# Altium PCB Power_Box_V2.PcbDoc (part 1 of 3)
Units mm, origin at the board's own origin, x right, y up, seen from the top; angles counter-clockwise.
Board outline 100 x 80 mm, 4 copper layers (Top Layer, Mid-Top, Mid-Bottom, Bottom Layer), stack 0.603 mm thick; 240 components, 204 nets, 825 pads, 313 vias.
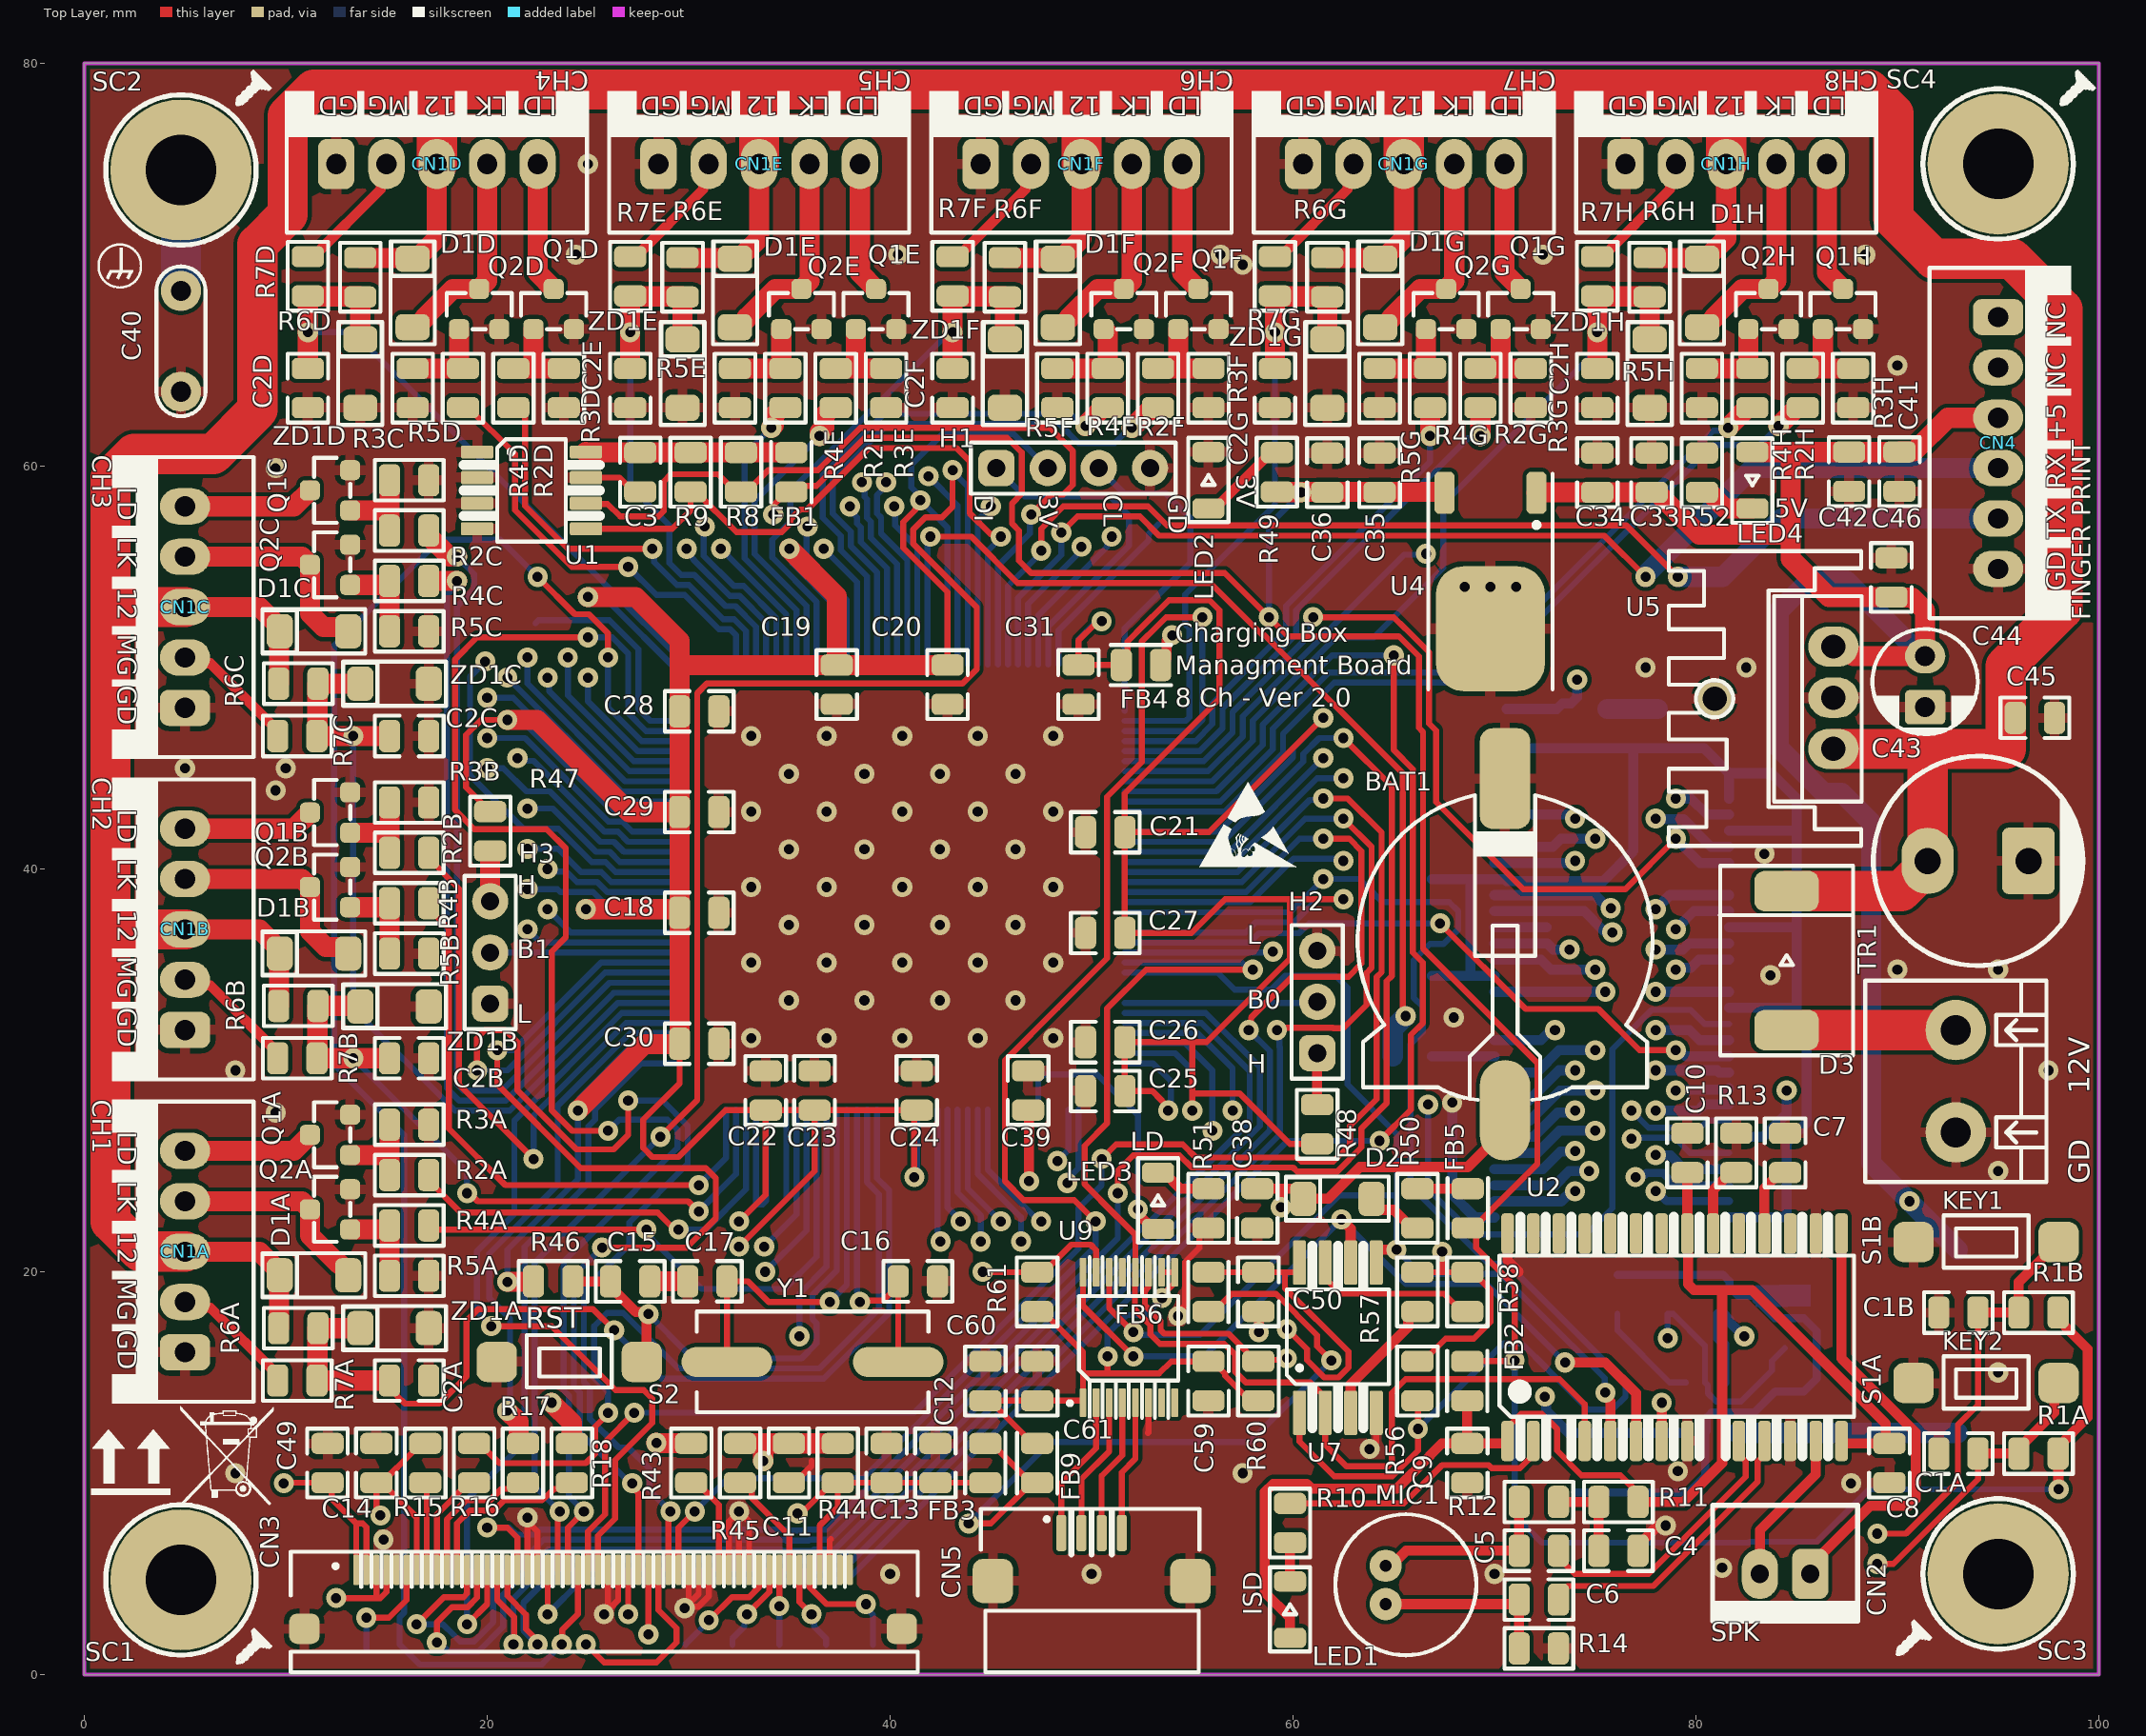
[diagram p0: Top Layer view]
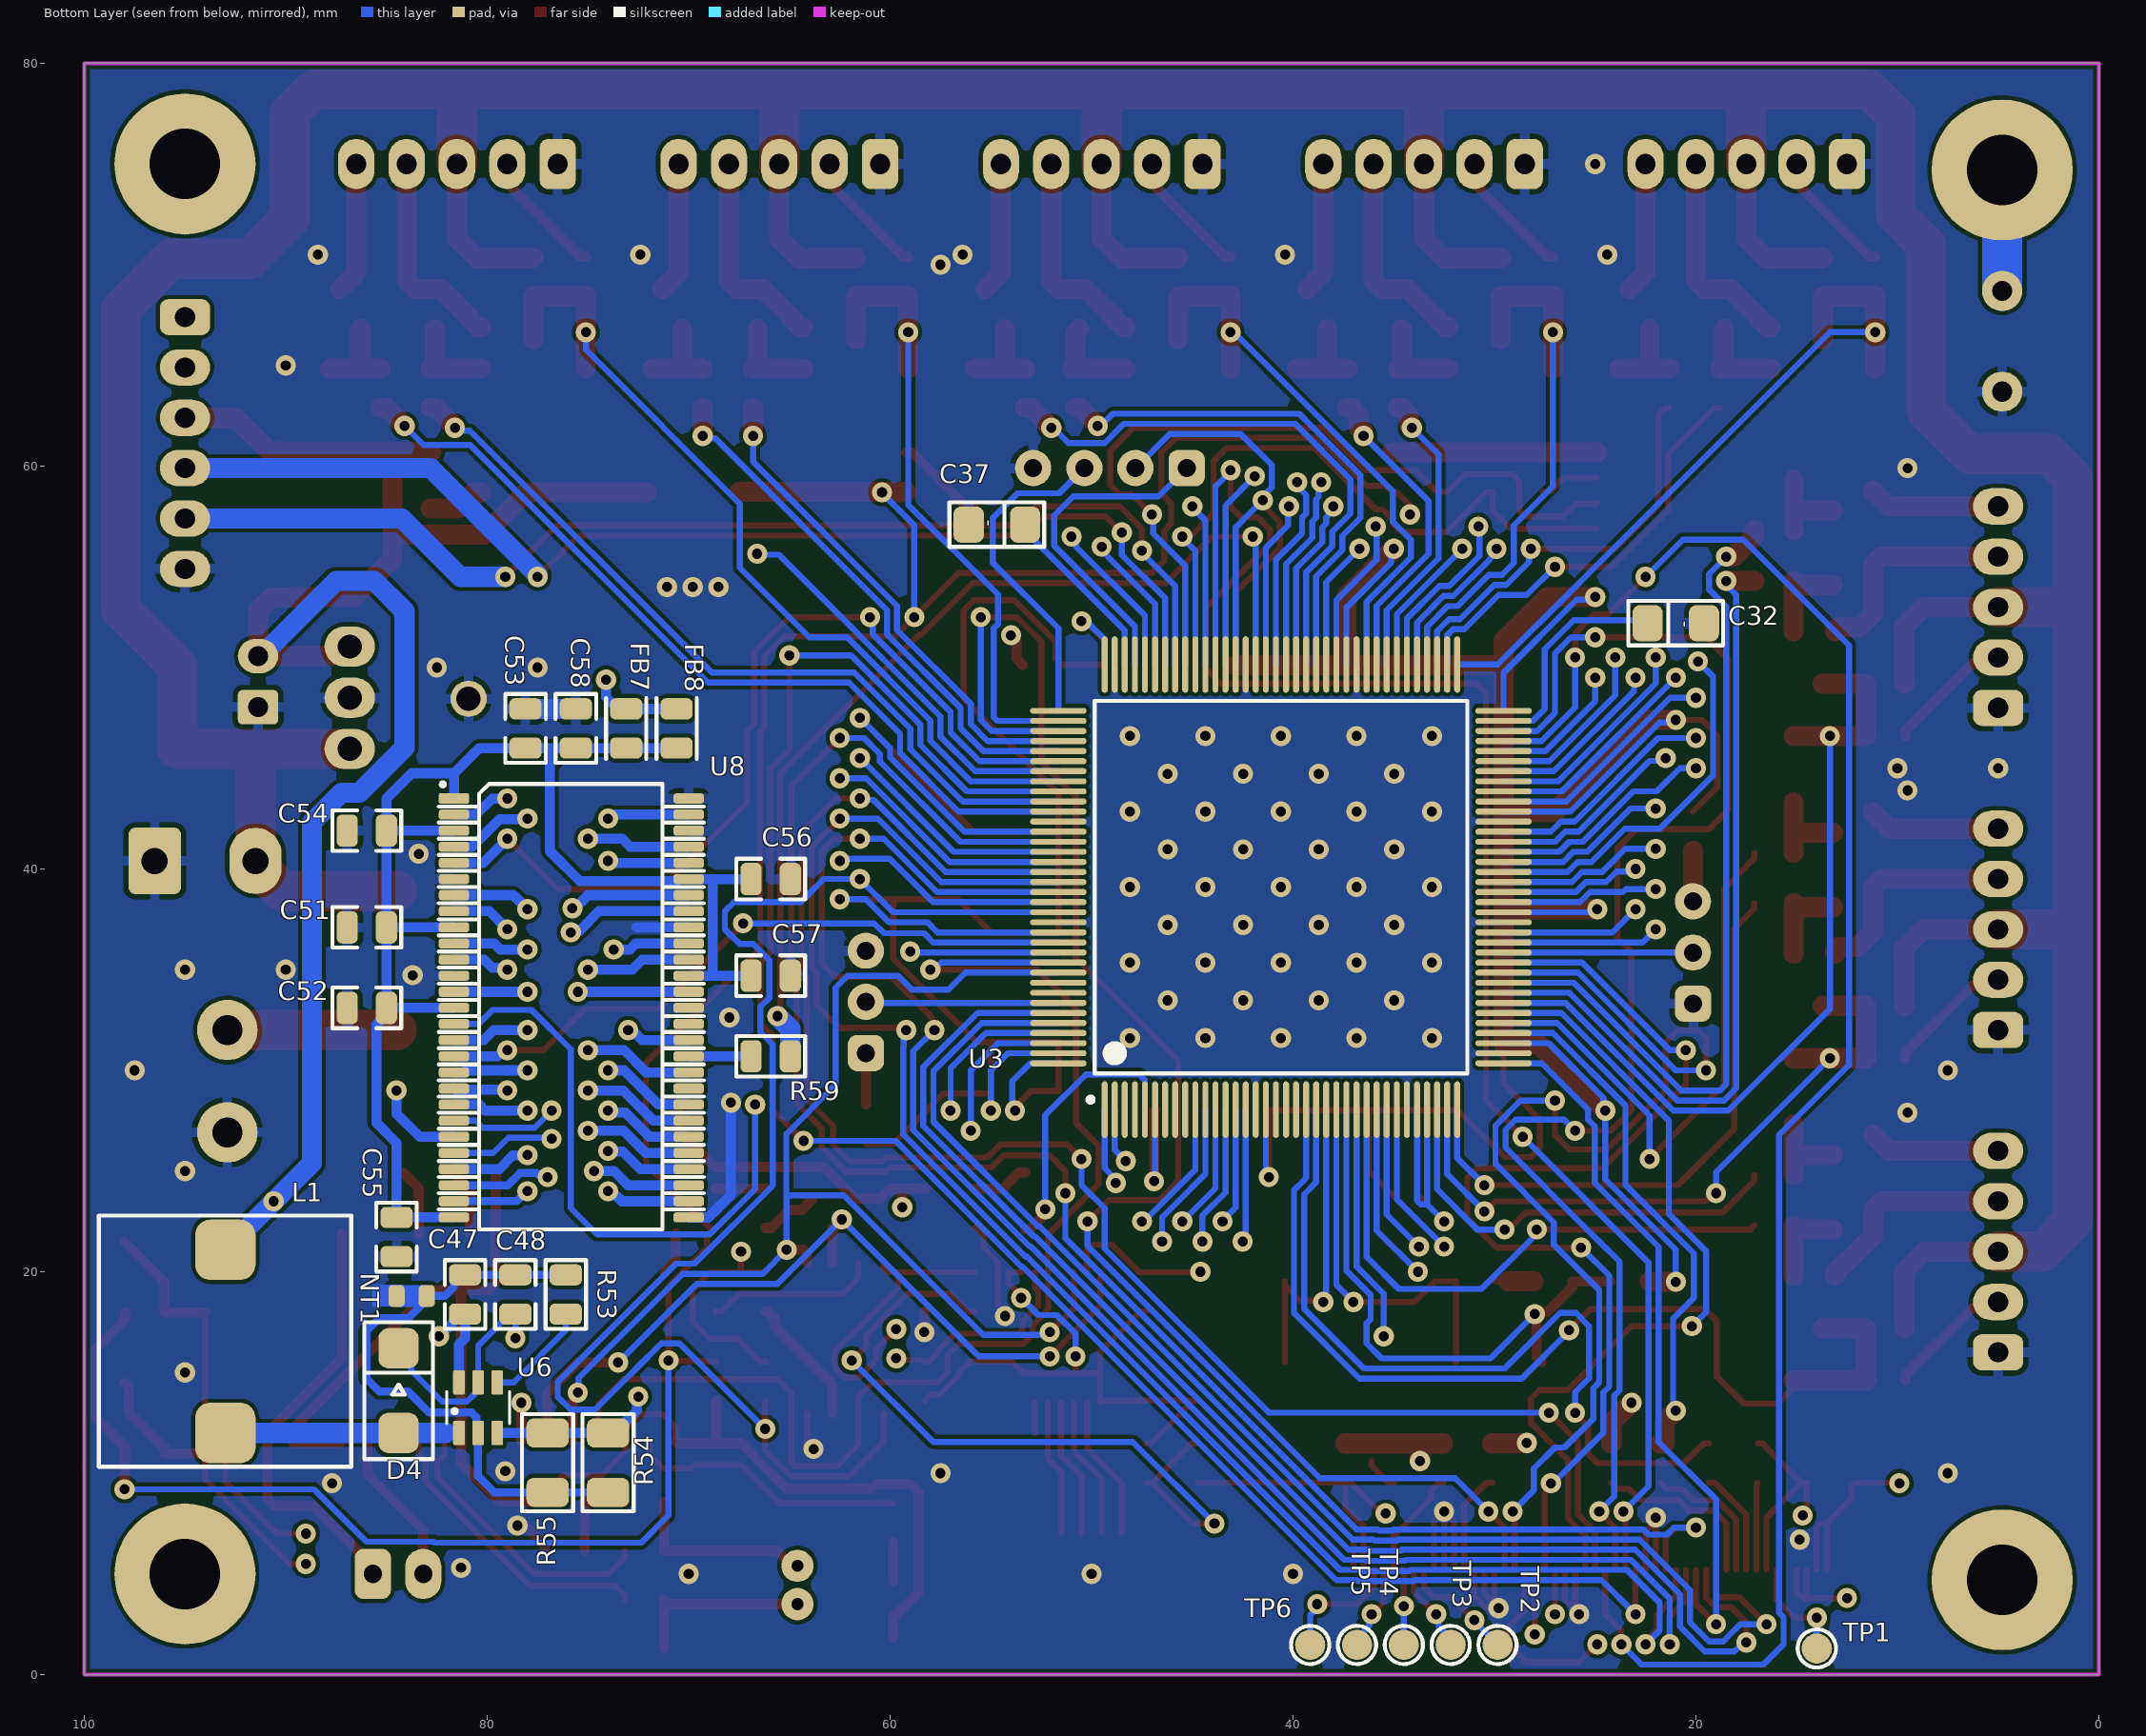
[diagram p1: Bottom Layer view, seen from below]
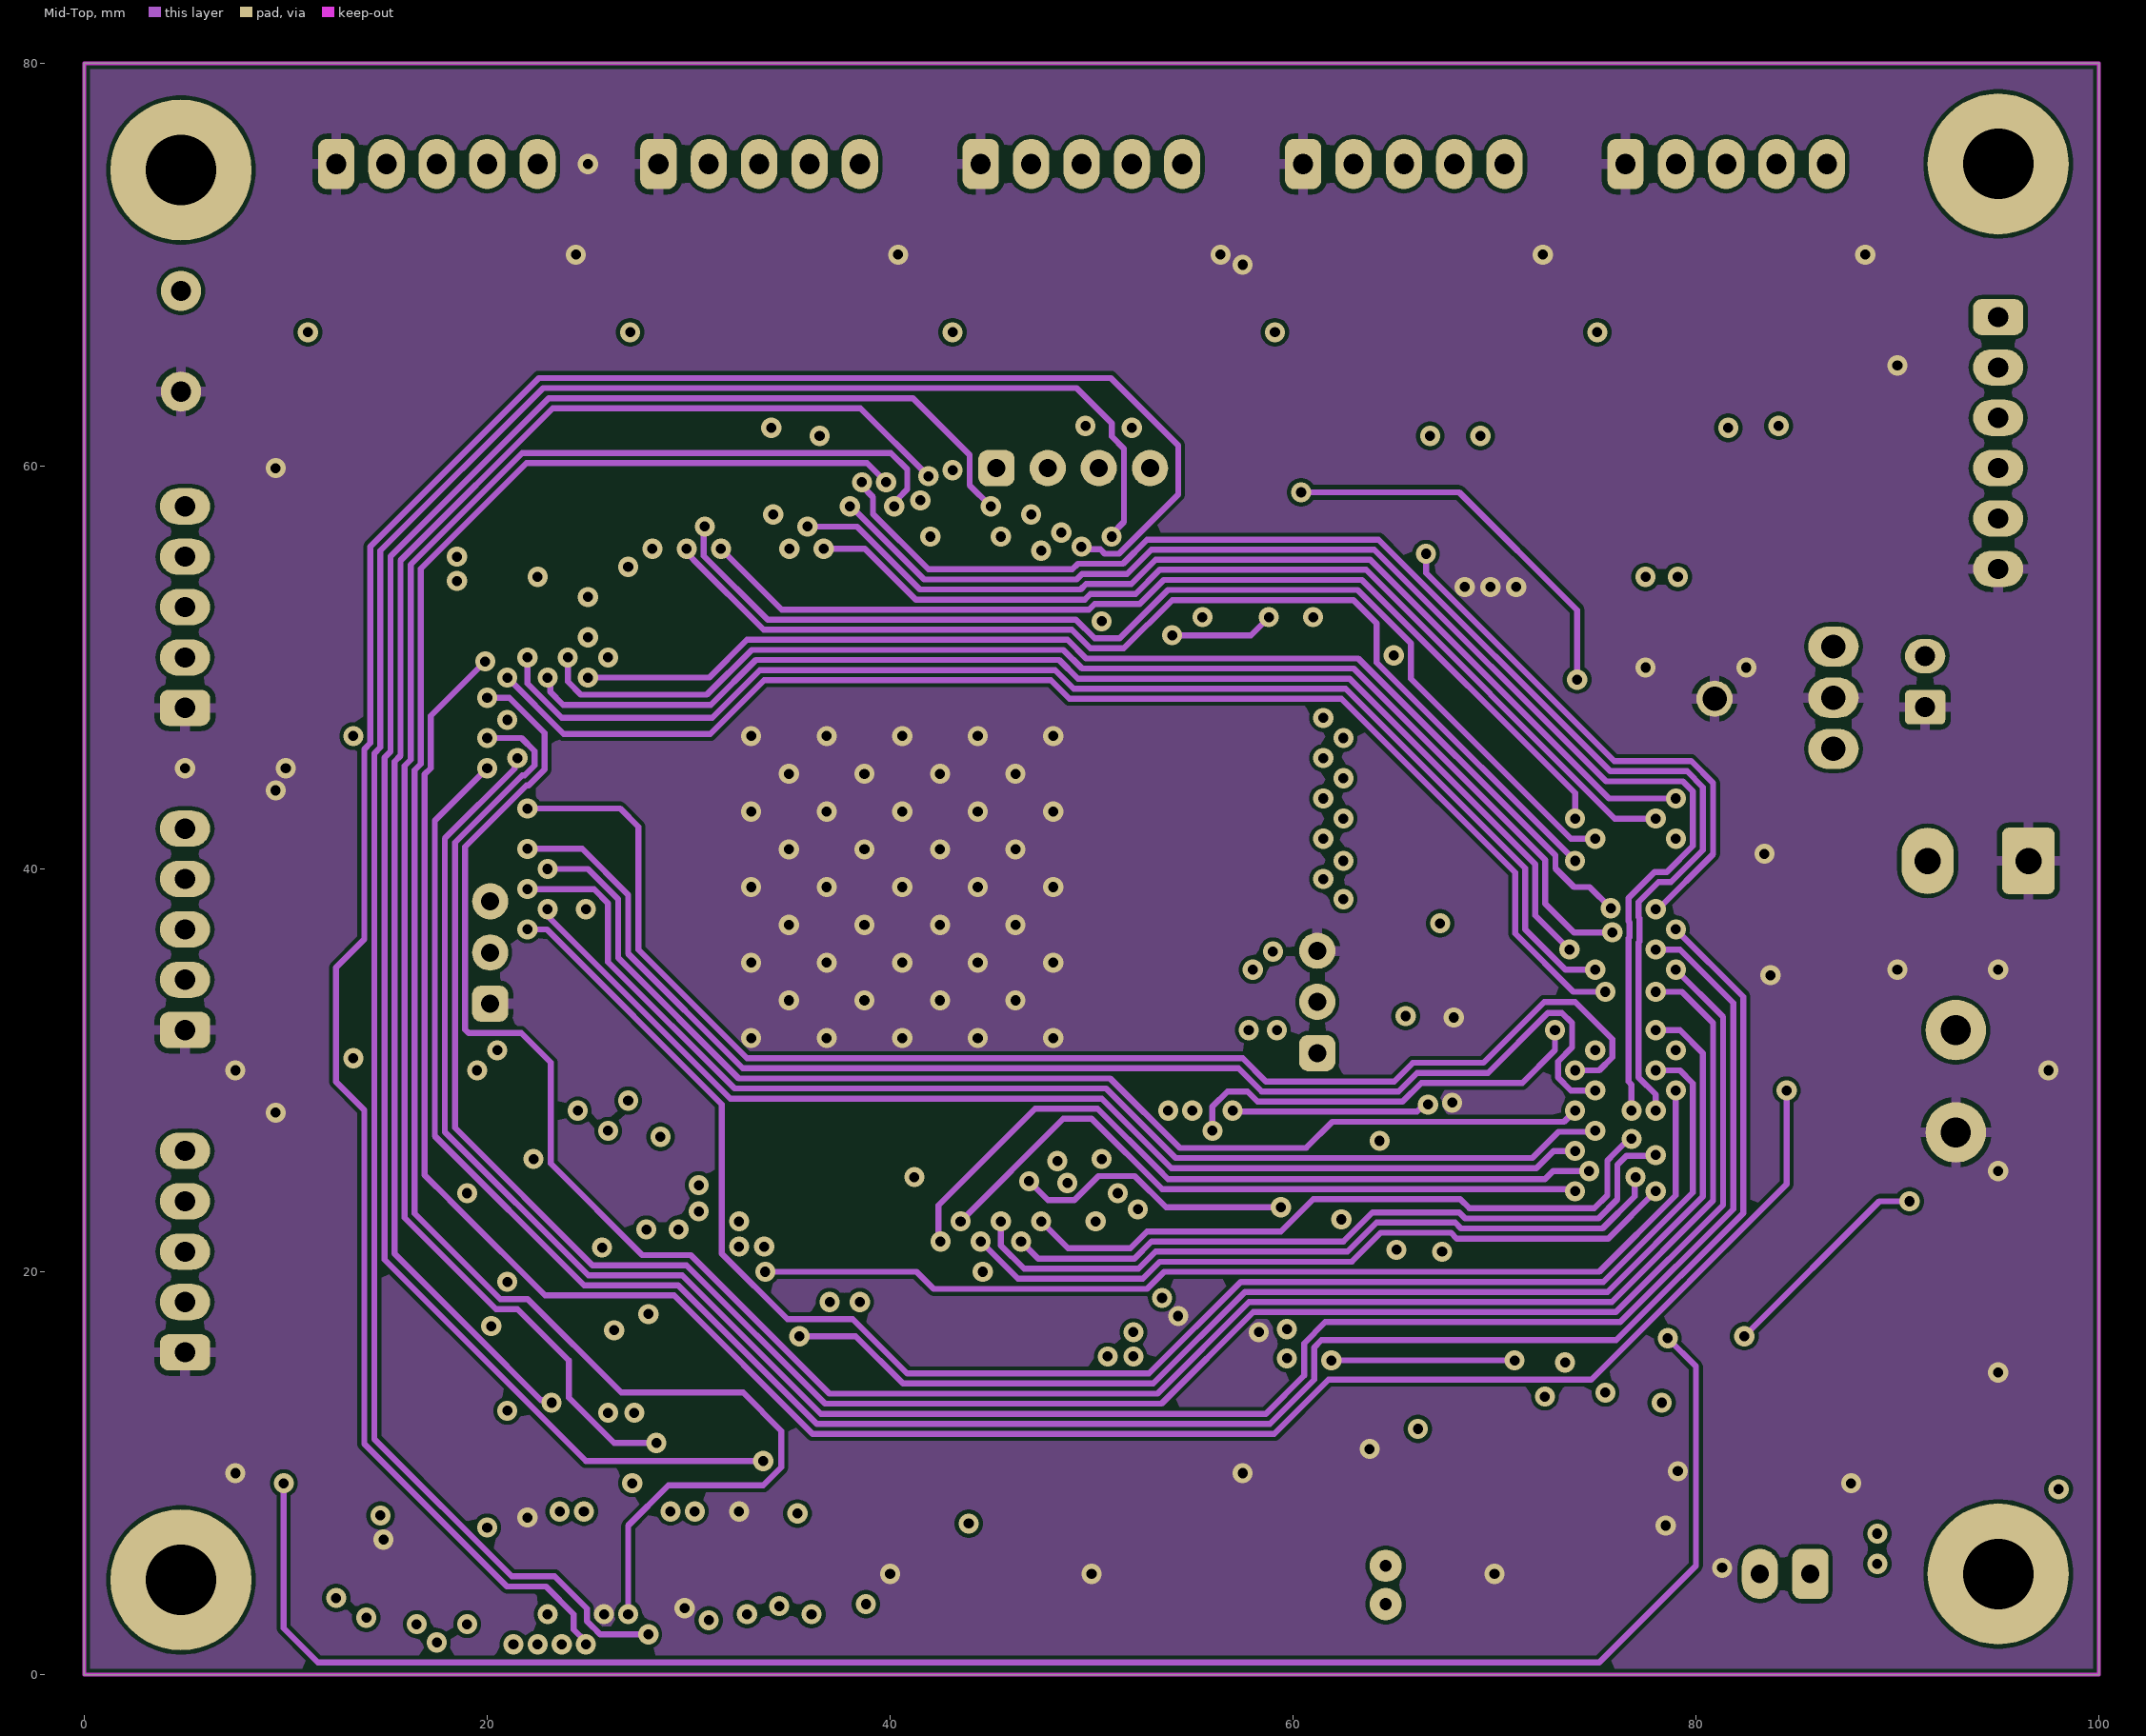
[diagram p2: Mid-Top]
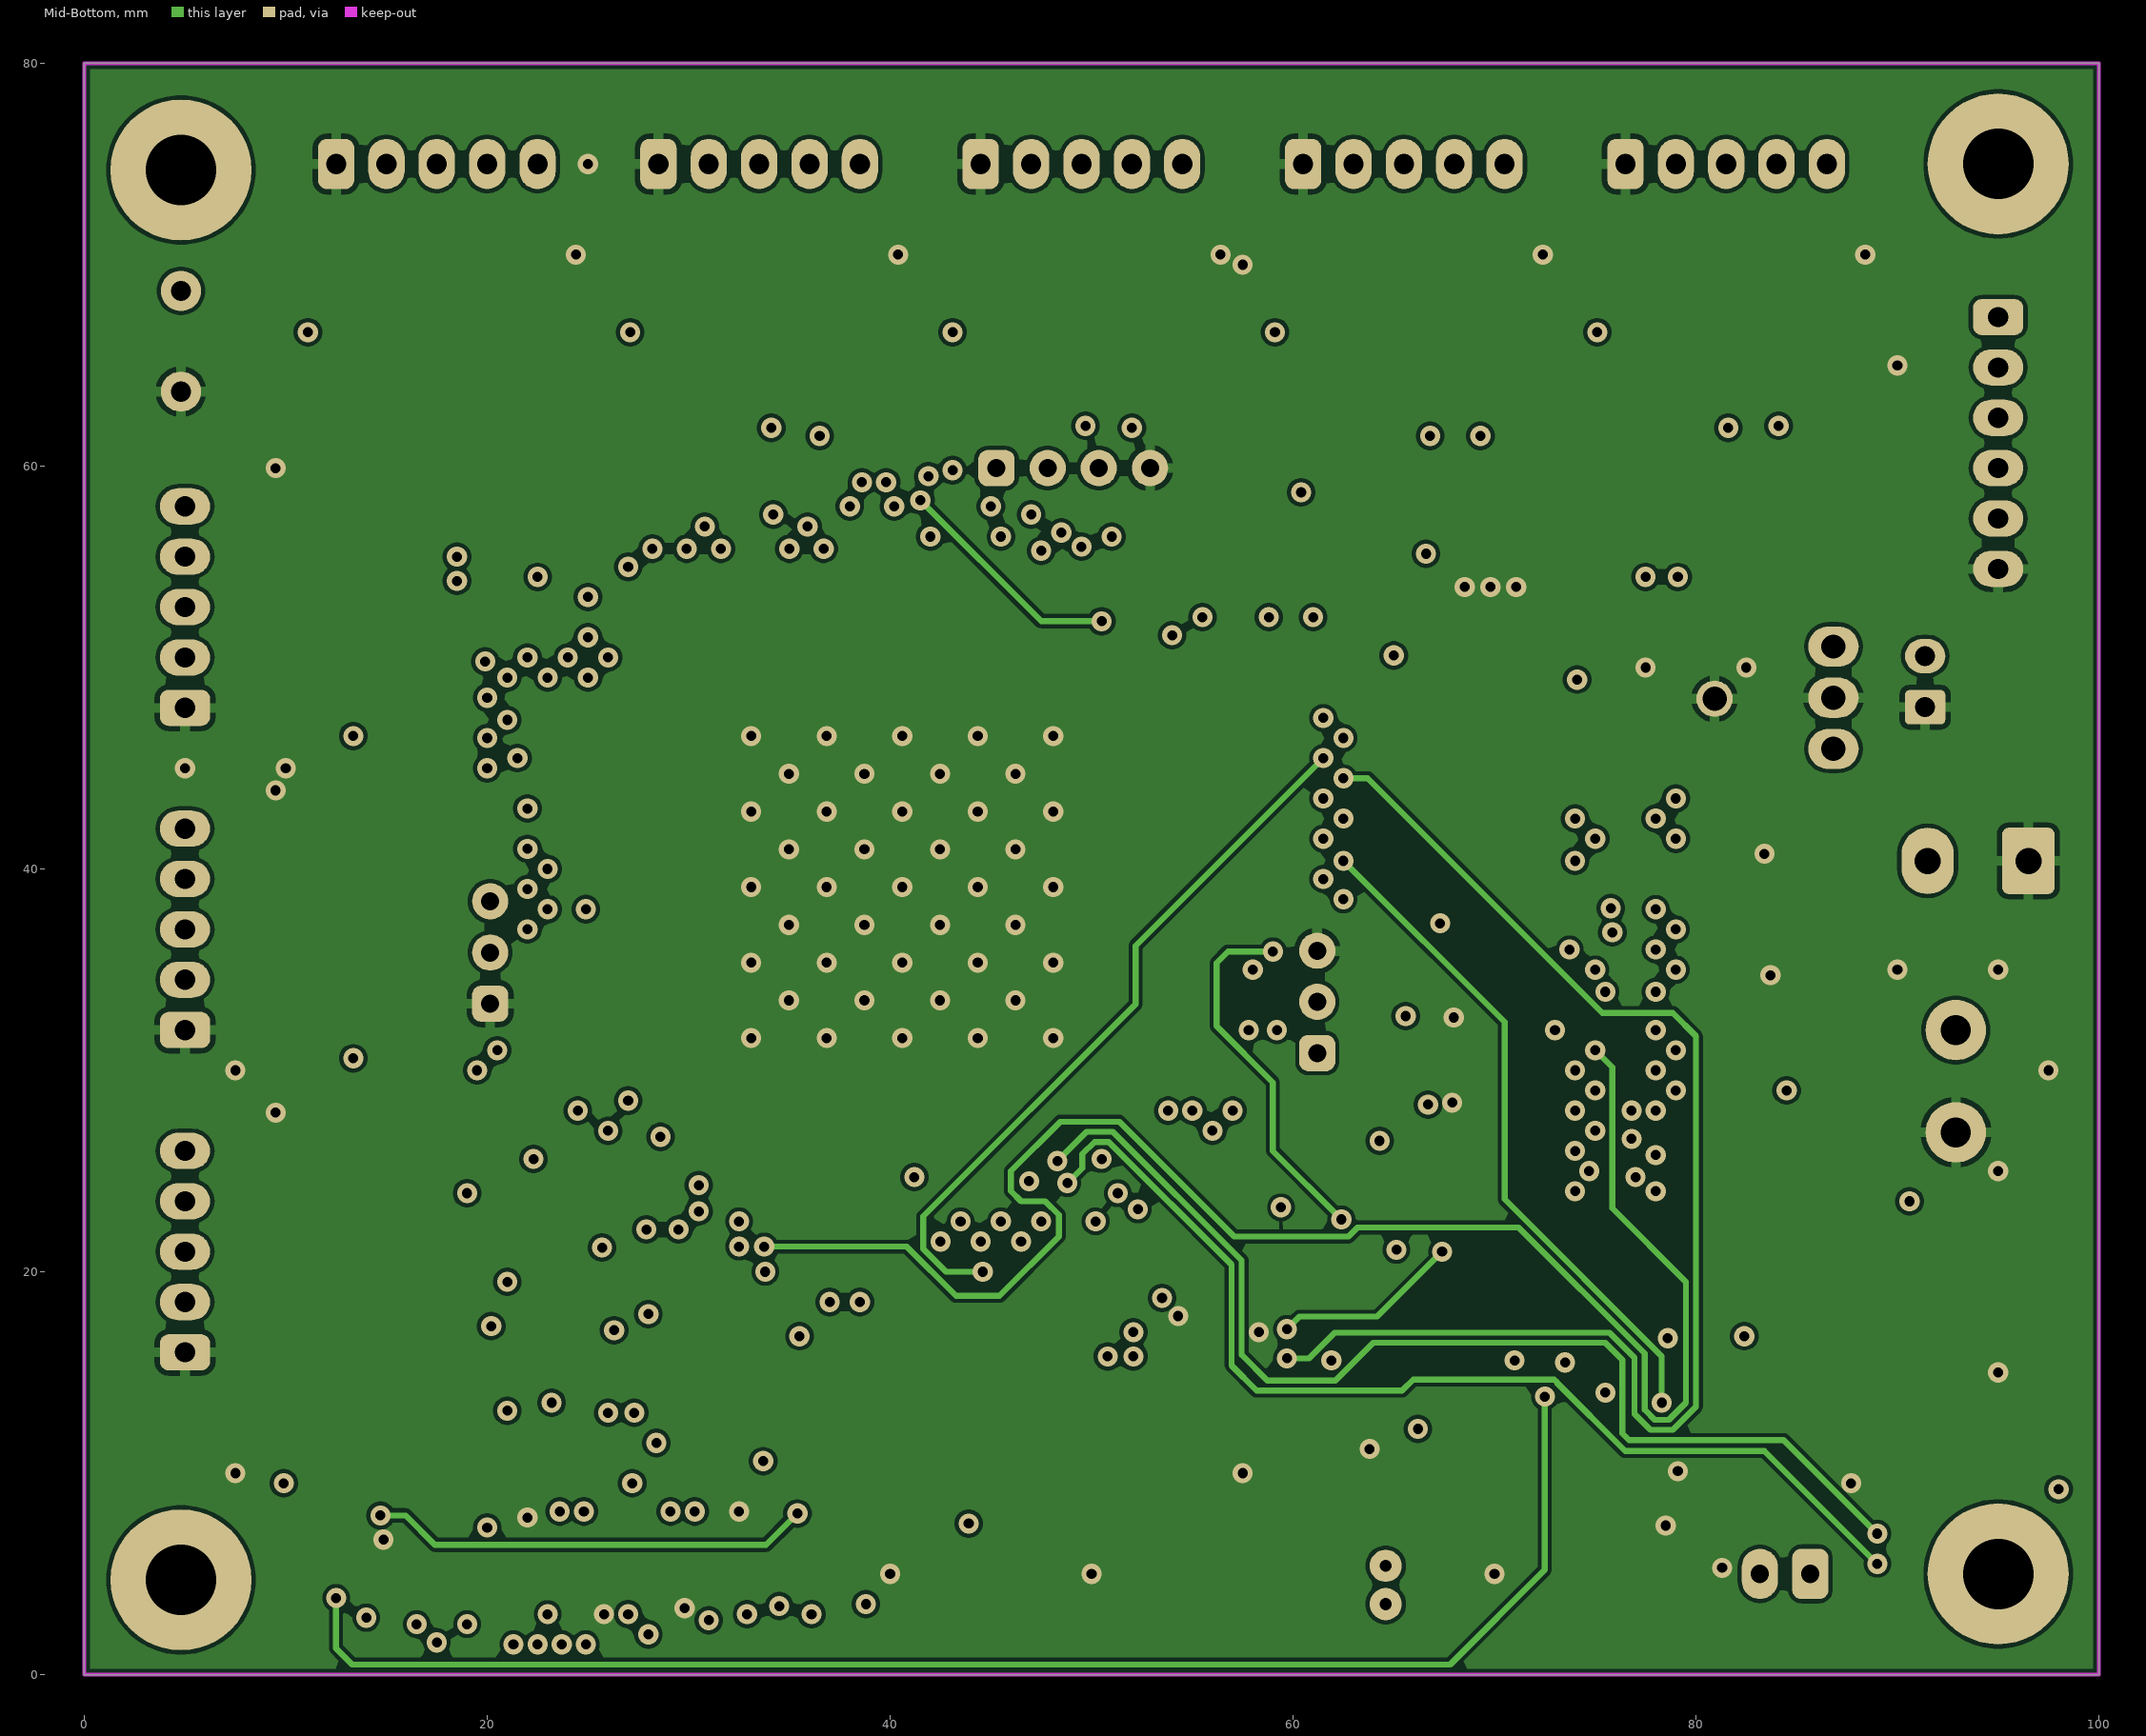
[diagram p3: Mid-Bottom]
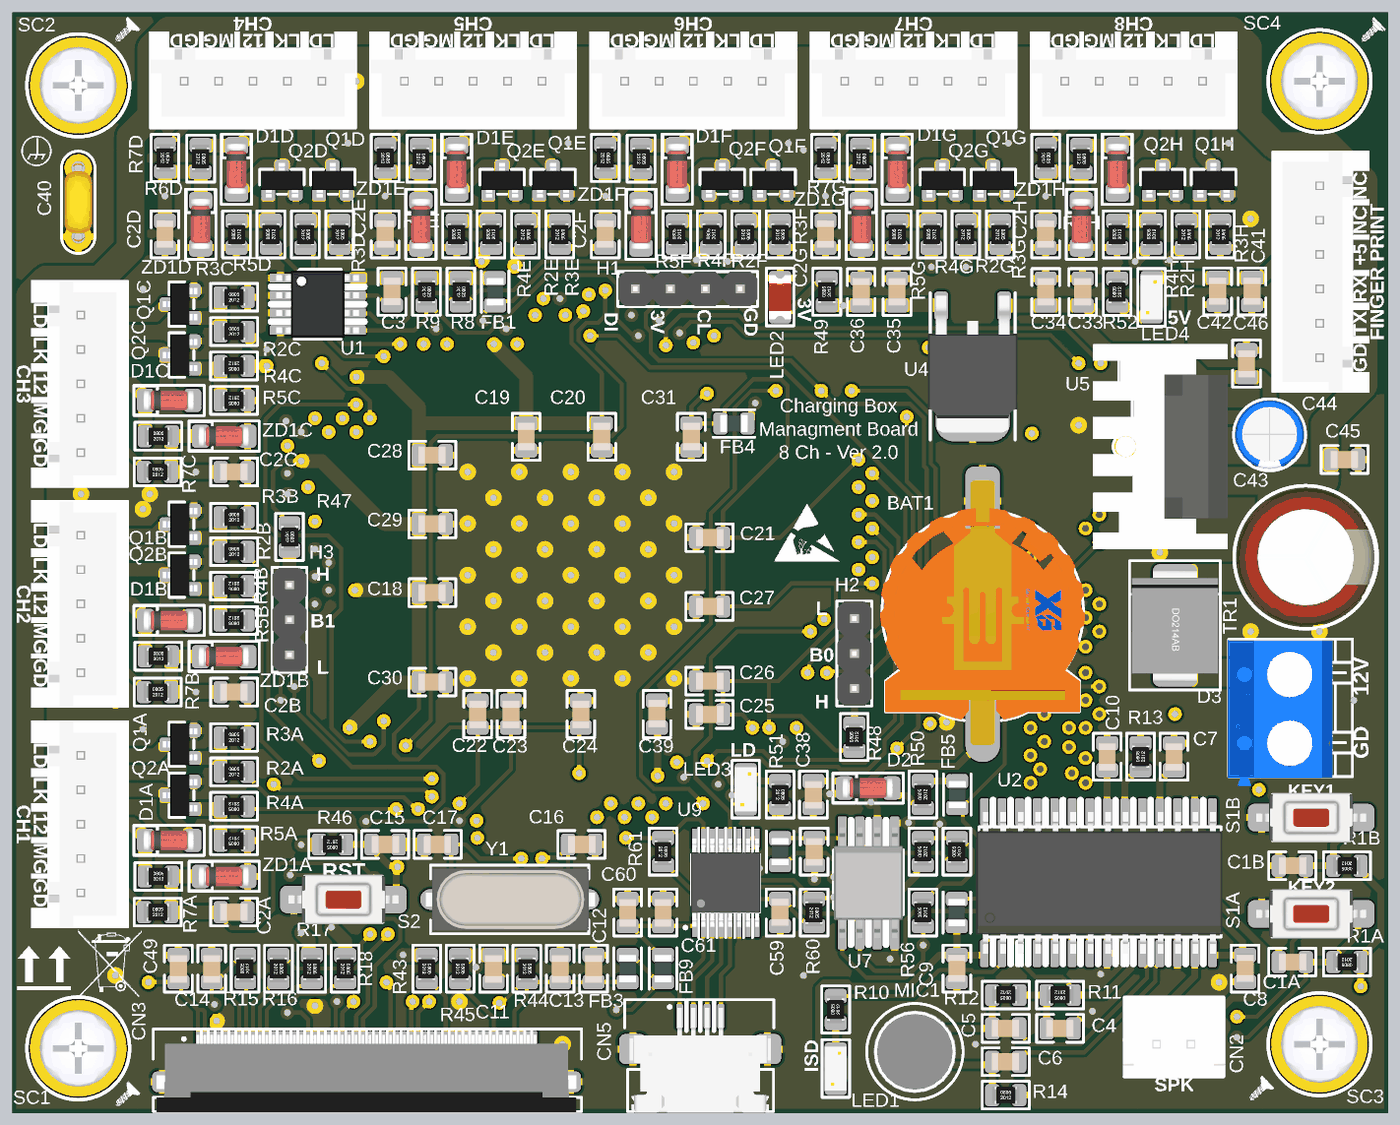
[diagram p6: 3D render of the assembled board from above, using the file's embedded part models]
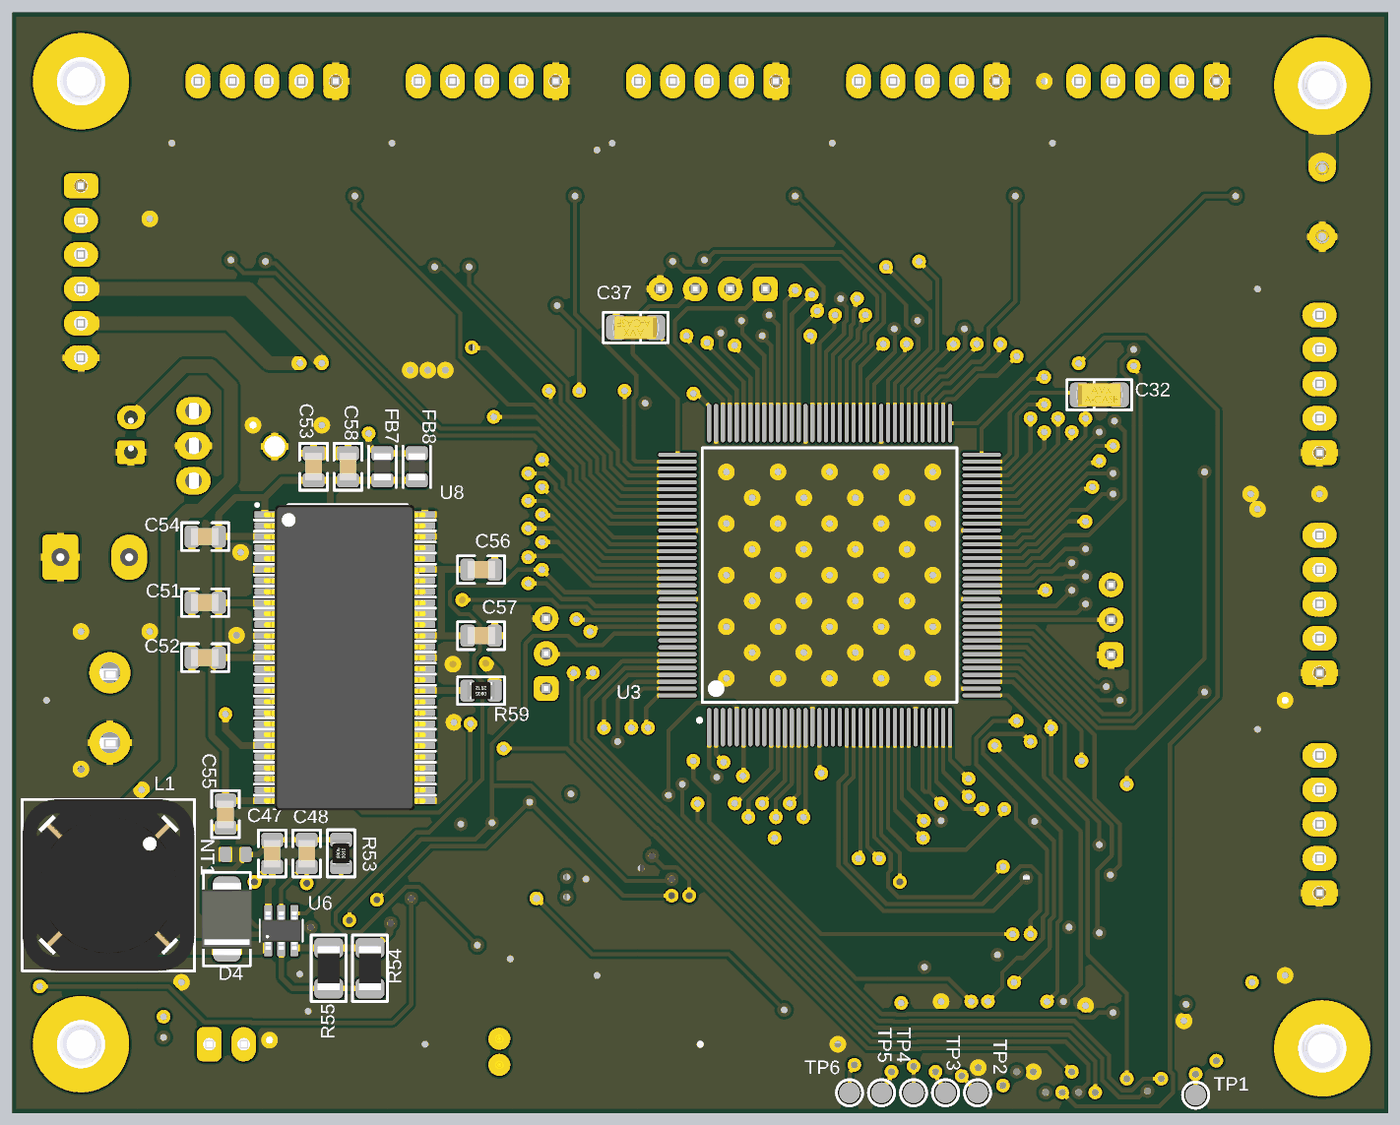
[diagram p7: 3D render of the assembled board from below, using the file's embedded part models]

## Layer stack, top to bottom
Top Solder: solder mask 0.0102, Solder Resist, Dk 3.5
Top Layer: signal copper 0.035
Dielectric 2: prepreg 0.0711, PP-006, Dk 4.1
Mid-Top: signal copper 0.0356
Dielectric 1: dielectric 0.32, FR-4, Dk 4.8
Mid-Bottom: signal copper 0.0356
Dielectric 3: prepreg 0.0711, PP-006, Dk 4.1
Bottom Layer: signal copper 0.035
Bottom Solder: solder mask 0.0102, Solder Resist, Dk 3.5

## Board outline
0,0 100,0 100,80 0,80

## Design rules (kind name [scope] priority, off if disabled: settings)
Clearance [All] p1: gap=0.2 ignorepadtopadclearanceinfootprint=TRUE
ComponentClearance ComponentClearance_ISD [InComponent('U2')] p1: gap=0.254 collisioncheckmode=3 verticalgap=0.1 showdistances=FALSE
ComponentClearance ComponentClearance_STM [InComponent('U3')] p2: gap=4 collisioncheckmode=3 verticalgap=0.254 showdistances=FALSE checkcomponentboundary=TRUE
ComponentClearance [All] p3: gap=0.2 collisioncheckmode=3 verticalgap=0.254 showdistances=FALSE checkcomponentboundary=TRUE
DiffPairsRouting [All] p1: maxlimit=0.3 minlimit=0.2 mostfreqgap=0.3 toplayer_minwidth=0.3 toplayer_maxwidth=0.5 toplayer_prefwidth=0.3 midlayer1_minwidth=0.3 midlayer1_maxwidth=0.5 midlayer1_prefwidth=0.3 midlayer2_minwidth=0.3 midlayer2_maxwidth=0.5 midlayer2_prefwidth=0.3 bottomlayer_minwidth=0.3 bottomlayer_maxwidth=0.5 bottomlayer_prefwidth=0.3 maxuncoupledlength=12.7
Height [All] p1: minheight=0 maxheight=25.4 prefheight=17.2
HoleToHoleClearance [All] p1: gap=0.2 allowstackedmicrovias=TRUE
MinimumSolderMaskSliver [All] p1: minsoldermaskwidth=0.2
PlaneConnect [All] p1: pad.planeconnectstyle=Relief pad.reliefexpansion=0.508 pad.reliefentries=4 pad.reliefconductorwidth=0.5 pad.reliefairgap=0.254 via.planeconnectstyle=Direct via.reliefexpansion=0.508 via.reliefentries=4 via.reliefconductorwidth=0.254 via.reliefairgap=0.254
PolygonConnect [All] p1: thpad.connectstyle=Relief thpad.reliefconductorwidth=0.5 thpad.reliefentries=4 thpad.polygonreliefangle="90 Angle" thpad.airgapwidth=0.254 smdpad.connectstyle=Relief smdpad.reliefconductorwidth=0.5 smdpad.reliefentries=4 smdpad.polygonreliefangle="90 Angle" smdpad.airgapwidth=0.254 via.connectstyle=Direct via.reliefconductorwidth=0.254 via.reliefentries=4 via.polygonreliefangle="90 Angle" via.airgapwidth=0.254
RoomDefinition CHANNELI [InComponentClass('CHANNELI')] p1: confinementstyle=ConfineIn formatcopy=TRUE lockcomponents=FALSE outline 73.5,61.9 89.5,61.9 89.5,80 73.5,80
RoomDefinition KEYC [InComponentClass('KEYC')] p2: confinementstyle=ConfineIn formatcopy=TRUE lockcomponents=FALSE outline 89.5,16.4 99.5,16.4 99.5,23.475 89.5,23.475
RoomDefinition IS42S16400J [InComponentClass('IS42S16400J')] p3: confinementstyle=ConfineOut formatcopy=TRUE lockcomponents=FALSE outline 197.756,13.676 275.26,13.676 275.26,39.052 197.756,39.052
RoomDefinition XPT2046 [InComponentClass('XPT2046')] p4: confinementstyle=ConfineOut formatcopy=TRUE lockcomponents=FALSE outline 102.075,-15.1 154.375,-15.1 154.375,0.1 102.075,0.1
RoomDefinition CHANNELH [InComponentClass('CHANNELH')] p5: confinementstyle=ConfineIn formatcopy=TRUE lockcomponents=FALSE outline 57.5,61.9 73.5,61.9 73.5,80 57.5,80
RoomDefinition CHANNELG [InComponentClass('CHANNELG')] p6: confinementstyle=ConfineIn formatcopy=TRUE lockcomponents=FALSE outline 41.5,61.9 57.5,61.9 57.5,80 41.5,80
RoomDefinition CHANNELF [InComponentClass('CHANNELF')] p7: confinementstyle=ConfineIn formatcopy=TRUE lockcomponents=FALSE outline 25.5,61.9 41.5,61.9 41.5,80 25.5,80
RoomDefinition CHANNELE [InComponentClass('CHANNELE')] p8: confinementstyle=ConfineIn formatcopy=TRUE lockcomponents=FALSE outline 9.5,61.9 25.5,61.9 25.5,80 9.5,80
RoomDefinition CHANNELD [InComponentClass('CHANNELD')] p9: confinementstyle=ConfineIn formatcopy=TRUE lockcomponents=FALSE outline 18.1,45 18.1,61 0,61 0,45
RoomDefinition CHANNELC [InComponentClass('CHANNELC')] p10: confinementstyle=ConfineIn formatcopy=TRUE lockcomponents=FALSE outline 18.1,29 18.1,45 0,45 0,29
RoomDefinition CHANNELB [InComponentClass('CHANNELB')] p11: confinementstyle=ConfineIn formatcopy=TRUE lockcomponents=FALSE outline 18.1,13 18.1,29 0,29 0,13
RoomDefinition W25Q32 [InComponentClass('W25Q32')] p12: confinementstyle=ConfineOut formatcopy=TRUE lockcomponents=FALSE outline 196,46.7 246.8,46.7 246.8,72.1 196,72.1
RoomDefinition MC3202 [InComponentClass('MC3202')] p13: confinementstyle=ConfineOut formatcopy=TRUE lockcomponents=FALSE outline 136.883,98.092 187.683,98.092 187.683,123.492 136.883,123.492
RoomDefinition ISD1730 [InComponentClass('ISD1730')] p14: confinementstyle=ConfineOut formatcopy=TRUE lockcomponents=FALSE outline 127.923,83.3 162.7,83.3 162.7,96.051 127.923,96.051
RoomDefinition TFT [InComponentClass('TFT')] p15: confinementstyle=ConfineOut formatcopy=TRUE lockcomponents=FALSE outline 101.131,184.835 348.143,184.835 348.143,219.162 101.131,219.162
RoomDefinition STM_AUX [InComponentClass('STM_AUX')] p16: confinementstyle=ConfineOut formatcopy=TRUE lockcomponents=FALSE outline 396.088,132.3 639,132.3 639,156.951 396.088,156.951
RoomDefinition Power [InComponentClass('Power')] p17: confinementstyle=ConfineOut formatcopy=TRUE lockcomponents=FALSE outline 167.348,122.524 243.202,122.524 243.202,157.326 167.348,157.326
RoomDefinition MCU [InComponentClass('MCU')] p18: confinementstyle=ConfineOut formatcopy=TRUE lockcomponents=FALSE outline 101.131,95.306 124.883,95.306 124.883,121.582 101.131,121.582
RoomDefinition KEYB [InComponentClass('KEYB')] p19: confinementstyle=ConfineIn formatcopy=TRUE lockcomponents=FALSE outline 89.5,9.4 99.5,9.4 99.5,16.475 89.5,16.475
RoomDefinition Interface [InComponentClass('Interface')] p20: confinementstyle=ConfineOut formatcopy=TRUE lockcomponents=FALSE outline 102.056,51.126 175.01,51.126 175.01,71.577 102.056,71.577
RoomDefinition EEPROM [InComponentClass('EEPROM')] p21: confinementstyle=ConfineOut formatcopy=TRUE lockcomponents=FALSE outline 102.056,41.801 129.633,41.801 129.633,49.876 102.056,49.876
RoutingVias [All] p1: holewidth=0.5 width=1 viastyle="Through Hole" minholewidth=0.5 minwidth=1 maxholewidth=0.711 maxwidth=1.27
SilkToSilkClearance [All] p1: silktosilkclearance=0.2
SilkToSolderMaskClearance [IsPad] p1: minsilkscreentomaskgap=0.2 clearancetoexposedcopper=TRUE
SolderMaskExpansion [All] p1: expansion=0.102 istentingtop=FALSE
Width [All] p1: maxlimit=2 minlimit=0.3 preferedwidth=0.5
22 further rules are at their usual default settings.

## Classes and differential pairs
net class MCU_KEY[1..2]: MCU_KEY1 MCU_KEY2
component class XPT2046: C59 C60 C61 CN5 FB9 R60 R61 U9
component class Power: C43 C44 C45 C46 D3 LED4 R52 TR1 U5
component class W25Q32: C50 FB6 R56 R57 R58 U7
component class IS42S16400J: C51 C52 C53 C54 C55 C56 C57 C58 FB7 FB8 R59 U8
channel class "Digital Input": KEYB KEYC
channel class Channel: CHANNELB CHANNELC CHANNELD CHANNELE CHANNELF CHANNELG CHANNELH CHANNELI
net class STM32: GND_MCU LTDC_B2 LTDC_B3 LTDC_B4 LTDC_B5 LTDC_B6 LTDC_B7 LTDC_CLK LTDC_DE LTDC_G2 LTDC_G3 LTDC_G4 LTDC_G5 LTDC_G6 LTDC_G7 LTDC_HSYNC LTDC_R2 LTDC_R3 LTDC_R4 LTDC_R5 LTDC_R6 LTDC_R7 LTDC_RST LTDC_VSYNC MCU_BOOT0 MCU_BOOT1 MCU_KEY1 MCU_KEY2 MCU_LED1 MCU_LED2 MCU_LED3 MCU_LED4 MCU_LED5 MCU_LED6 MCU_LED7 MCU_LED8 MCU_LOCK1 MCU_LOCK2 MCU_LOCK3 MCU_LOCK4 MCU_LOCK5 MCU_LOCK6 MCU_LOCK7 MCU_LOCK8 MCU_MAGNET1 MCU_MAGNET2 MCU_MAGNET3 MCU_MAGNET4 MCU_MAGNET5 MCU_MAGNET6 MCU_MAGNET7 MCU_MAGNET8 MCU_NRST MCU_OCS_N MCU_OCS_P MCU_RXD MCU_SCL MCU_SDA MCU_SWCLK MCU_SWDIO MCU_TXD MCU_VBAT NetLED3_1 NetR56_1 NetR59_1 NetR60_1 NetR61_1 NetU2_4 NetU2_5 NetU2_6 NetU2_7 NetU3_1 NetU3_2 NetU3_3 NetU3_4 NetU3_5 NetU3_7 NetU3_8 NetU3_9 NetU3_10 NetU3_11 NetU3_12 NetU3_13 NetU3_14 NetU3_15 NetU3_26 NetU3_28 NetU3_29 NetU3_48 NetU3_49 NetU3_50 NetU3_53 NetU3_54 NetU3_55 NetU3_56 NetU3_57 NetU3_58 NetU3_59 NetU3_60 NetU3_63 NetU3_64 NetU3_65 NetU3_66 NetU3_67 NetU3_68 NetU3_69 NetU3_70 NetU3_77 NetU3_78 NetU3_79 NetU3_80 NetU3_81 NetU3_82 NetU3_85 NetU3_86 NetU3_87 NetU3_88 NetU3_89 NetU3_90 NetU3_91 NetU3_92 NetU3_93 NetU3_96 NetU3_97 NetU3_98 NetU3_99 NetU3_100 NetU3_103 NetU3_104 NetU3_110 NetU3_111 NetU3_112 NetU3_113 NetU3_114 NetU3_115 NetU3_116 NetU3_117 NetU3_118 NetU3_119 NetU3_122 NetU3_123 NetU3_124 NetU3_125 NetU3_126 NetU3_127 NetU3_128 NetU3_129 NetU3_132 NetU3_133 NetU3_134 NetU3_135 NetU3_139 NetU3_140 NetU3_141 NetU3_142 NetU3_143 V_CAP_1 V_CAP_2 VCC_MCU
net class MCU_MAGNET[1..8]: MCU_MAGNET1 MCU_MAGNET2 MCU_MAGNET3 MCU_MAGNET4 MCU_MAGNET5 MCU_MAGNET6 MCU_MAGNET7 MCU_MAGNET8
net class MCU_LOCK[1..8]: MCU_LOCK1 MCU_LOCK2 MCU_LOCK3 MCU_LOCK4 MCU_LOCK5 MCU_LOCK6 MCU_LOCK7 MCU_LOCK8
net class MCU_LED[1..8]: MCU_LED1 MCU_LED2 MCU_LED3 MCU_LED4 MCU_LED5 MCU_LED6 MCU_LED7 MCU_LED8
net class ISD: +3V3 GND_MCU ISD_LED ISD_MIC_N ISD_MIC_P NetC4_1 NetC5_1 NetC6_1 NetC7_1 NetLED1_2 NetR13_1 NetU2_3 NetU2_4 NetU2_5 NetU2_6 NetU2_7 NetU2_9 NetU2_17 NetU2_19 NetU2_22 NetU2_23 NetU2_24 NetU2_25 NetU2_26 NetU2_27 SPK_N SPK_P VCC_ISD
net class FPC: GND_MCU LTDC_B2 LTDC_B3 LTDC_B4 LTDC_B5 LTDC_B6 LTDC_B7 LTDC_CLK LTDC_DE LTDC_G2 LTDC_G3 LTDC_G4 LTDC_G5 LTDC_G6 LTDC_G7 LTDC_HSYNC LTDC_R2 LTDC_R3 LTDC_R4 LTDC_R5 LTDC_R6 LTDC_R7 LTDC_RST LTDC_VSYNC NetCN3_1 NetCN3_2 NetCN3_3 NetCN3_4 NetCN3_6 NetCN3_8 NetCN3_9 NetCN3_10 NetCN3_11 NetCN3_37 NetCN3_41 NetCN3_42 NetCN3_43 NetCN3_44 NetCN3_45 NetCN3_46 V_LED+ V_LED- VCC_TFT
component class TFT: C11 C12 C13 C14 CN3 FB3 R15 R16 R17 R18 R43 R44 R45 TP1 TP2 TP3 TP4 TP5 TP6
component class STM_AUX: BAT1 C15 C16 C17 C18 C19 C20 C21 C22 C23 C24 C25 C26 C27 C28 C29 C30 C31 C32 C33 C34 C35 C36 C37 C38 C39 D2 FB4 FB5 H1 H2 H3 LED2 R46 R47 R48 R49 R50 S2 U4 Y1
component class MC3202: C C48 C49 D4 L1 R54 R55 U6
component class MCU: U3
component class KEYC: C1B R1B S1B
component class KEYB: C1A R1A S1A
component class ISD1730: C4 C5 C6 C7 C8 C9 C10 CN2 FB2 LED1 MIC1 R10 R11 R12 R13 R14 U2
component class Interface: C40 C41 C42 CN4 LED3 NT1 R51 SC1 SC2 SC3 SC4
component class EEPROM: C3 FB1 R8 R9 U1
component class CHANNELI: C2H CN1H D1H Q1H Q2H R2H R3H R4H R5H R6H R7H ZD1H
component class CHANNELH: C2G CN1G D1G Q1G Q2G R2G R3G R4G R5G R6G R7G ZD1G
component class CHANNELG: C2F CN1F D1F Q1F Q2F R2F R3F R4F R5F R6F R7F ZD1F
component class CHANNELF: C2E CN1E D1E Q1E Q2E R2E R3E R4E R5E R6E R7E ZD1E
component class CHANNELE: C2D CN1D D1D Q1D Q2D R2D R3D R4D R5D R6D R7D ZD1D
component class CHANNELD: C2C CN1C D1C Q1C Q2C R2C R3C R4C R5C R6C R7C ZD1C
component class CHANNELC: C2B CN1B D1B Q1B Q2B R2B R3B R4B R5B R6B R7B ZD1B
component class CHANNELB: C2A CN1A D1A Q1A Q2A R2A R3A R4A R5A R6A R7A ZD1A
differential pair ISD_MIC: +ISD_MIC_P -ISD_MIC_N

## Components (designator, comment, footprint, x,y, rotation, side; value= is the part's Value field where it differs from the comment)
BAT1 "Bat Holder 2016-SMD" BAT-HOLDER-SMD-1220 70.525,36.25 r180 top
C1A "CAP Cer 100nF-50V-X7R-SMD" C-0805 93.025,10.975 r180 top value=100nF (schematic designator C1)
C1B "CAP Cer 100nF-50V-X7R-SMD" C-0805 93.025,17.975 r180 top value=100nF (schematic designator C1)
C2A "CAP Cer 100nF-50V-X7R-SMD" C-0805 16.125,14.6 r0 top value=100nF (schematic designator C2)
C2B "CAP Cer 100nF-50V-X7R-SMD" C-0805 16.125,30.6 r0 top value=100nF (schematic designator C2)
C2C "CAP Cer 100nF-50V-X7R-SMD" C-0805 16.125,46.6 r0 top value=100nF (schematic designator C2)
C2D "CAP Cer 100nF-50V-X7R-SMD" C-0805 11.1,63.875 r270 top value=100nF (schematic designator C2)
C2E "CAP Cer 100nF-50V-X7R-SMD" C-0805 27.1,63.875 r270 top value=100nF (schematic designator C2)
C2F "CAP Cer 100nF-50V-X7R-SMD" C-0805 43.1,63.875 r270 top value=100nF (schematic designator C2)
C2G "CAP Cer 100nF-50V-X7R-SMD" C-0805 59.1,63.875 r270 top value=100nF (schematic designator C2)
C2H "CAP Cer 100nF-50V-X7R-SMD" C-0805 75.1,63.875 r270 top value=100nF (schematic designator C2)
C3 "CAP Cer 100nF-50V-X7R-SMD" C-0805 27.597,59.7 r270 top value=100nF
C4 "CAP Cer 4.7uF-50V-X7R-SMD" C-0805 76.15,6.15 r0 top value=4.7uF
C5 "CAP Cer 100nF-50V-X7R-SMD" C-0805 72.2,6.15 r0 top value=100nF
C6 "CAP Cer 100nF-50V-X7R-SMD" C-0805 72.2,3.725 r0 top value=100nF
C7 "CAP Cer 4.7uF-50V-X7R-SMD" C-0805 84.425,25.9 r90 top value=4.7uF
C8 "CAP Cer 100nF-50V-X7R-SMD" C-0805 89.6,10.5 r270 top value=100nF
C9 "CAP Cer 100nF-50V-X7R-SMD" C-0805 68.648,10.5 r270 top value=100nF
C10 "CAP Cer 100nF-50V-X7R-SMD" C-0805 79.575,25.9 r90 top value=100nF
C11 "CAP Cer 100nF-50V-X7R-SMD" C-0805 34.975,10.5 r90 top value=100nF
C12 "CAP Cer 10uF-50V-X7R-SMD" C-0805 42.25,10.5 r90 top value=10uF
C13 "CAP Cer 100nF-50V-X7R-SMD" C-0805 39.825,10.5 r90 top value=100nF
C14 "CAP Cer 100nF-50V-X7R-SMD" C-0805 14.5,10.5 r90 top value=100nF
C15 "CAP Cer 100nF-50V-X7R-SMD" C-0805 27.1,19.525 r180 top value=100nF
C16 "CAP Cer 18pF-50V-X7R-SMD" C-0805 41.375,19.525 r180 top value=18pF
C17 "CAP Cer 18pF-50V-X7R-SMD" C-0805 30.925,19.525 r0 top value=18pF
C18 "CAP Cer 100nF-50V-X7R-SMD" C-0805 30.525,37.825 r0 top value=100nF
C19 "CAP Cer 100nF-50V-X7R-SMD" C-0805 37.35,49.15 r270 top value=100nF
C20 "CAP Cer 100nF-50V-X7R-SMD" C-0805 42.85,49.15 r270 top value=100nF
C21 "CAP Cer 100nF-50V-X7R-SMD" C-0805 50.675,41.825 r180 top value=100nF
C22 "CAP Cer 100nF-50V-X7R-SMD" C-0805 33.825,29 r90 top value=100nF
C23 "CAP Cer 100nF-50V-X7R-SMD" C-0805 36.25,29 r90 top value=100nF
C24 "CAP Cer 100nF-50V-X7R-SMD" C-0805 41.325,29 r90 top value=100nF
C25 "CAP Cer 100nF-50V-X7R-SMD" C-0805 50.675,28.975 r180 top value=100nF
C26 "CAP Cer 100nF-50V-X7R-SMD" C-0805 50.675,31.4 r180 top value=100nF
C27 "CAP Cer 100nF-50V-X7R-SMD" C-0805 50.675,36.825 r180 top value=100nF
C28 "CAP Cer 100nF-50V-X7R-SMD" C-0805 30.525,47.825 r0 top value=100nF
C29 "CAP Cer 100nF-50V-X7R-SMD" C-0805 30.525,42.825 r0 top value=100nF
C30 "CAP Cer 100nF-50V-X7R-SMD" C-0805 30.525,31.325 r0 top value=100nF
C31 "CAP Cer 100nF-50V-X7R-SMD" C-0805 49.35,49.15 r270 top value=100nF
C32 "" TAN-A 21,52.2 r180 bottom value=2.2uF
C33 "CAP Cer 22uF-50V-X7R-SMD" C-0805 77.795,59.675 r270 top value=22uF
C34 "CAP Cer 100nF-50V-X7R-SMD" C-0805 75.103,59.675 r270 top value=100nF
C35 "CAP Cer 10uF-50V-X7R-SMD" C-0805 64.297,59.675 r270 top value=10uF
C36 "CAP Cer 100nF-50V-X7R-SMD" C-0805 61.698,59.675 r270 top value=100nF
C37 "" TAN-A 54.7,57.1 r0 bottom value=2.2uF
C38 "CAP Cer 10uF-50V-X7R-SMD" C-0805 58.225,23.15 r90 top value=10uF
C39 "CAP Cer 100nF-50V-X7R-SMD" C-0805 46.85,29 r270 top value=100nF
C40 "CAP Cer 10nF-1KV-X7R-THD" CAP-CER-7x2.5-Ls5 4.8,66.2 r270 top value=10nF
C41 "CAP Cer 100nF-50V-X7R-SMD" C-0805 90.1,59.725 r270 top value=100nF
C42 "CAP Cer 1uF-50V-X7R-SMD" C-0805 87.6,59.725 r270 top value=1uF
C43 "CAP Elec 1000uF-25V-10x25-THD" CAP-Elec-10x25-5 94,40.4 r0 top value=1000uF
C44 "CAP Elec 1000uF-10V-5x7mm-THD" cap-Elec-5x7 91.375,49.3 r270 top value=1000uF
C45 "CAP Cer 100nF-50V-X7R-SMD" C-0805 96.825,47.5 r0 top value=100nF
C46 "CAP Cer 100nF-50V-X7R-SMD" C-0805 89.7,54.475 r90 top value=100nF
C47 "CAP Cer 4.7uF-16V-X7R-SMD" C-0805 81.1,18.875 r90 bottom value=4.7uF
C48 "CAP Cer 2.2uF-25V-X7R-SMD" C-0805 78.6,18.875 r90 bottom value=2.2uF
C49 "CAP Cer 2.2uF-25V-X7R-SMD" C-0805 12.075,10.5 r90 top value=2.2uF
C50 "CAP Cer 100nF-50V-X7R-SMD" C-0805 58.28,19 r90 top value=100nF
C51 "CAP Cer 100nF-50V-X7R-SMD" C-0805 85.975,37.1 r180 bottom value=100nF
C52 "CAP Cer 100nF-50V-X7R-SMD" C-0805 85.975,33.1 r180 bottom value=100nF
C53 "CAP Cer 100nF-50V-X7R-SMD" C-0805 78.1,46.975 r270 bottom value=100nF
C54 "CAP Cer 100nF-50V-X7R-SMD" C-0805 85.975,41.9 r180 bottom value=100nF
C55 "CAP Cer 100nF-50V-X7R-SMD" C-0805 84.5,21.725 r90 bottom value=100nF
C56 "CAP Cer 100nF-50V-X7R-SMD" C-0805 65.925,39.5 r0 bottom value=100nF
C57 "CAP Cer 100nF-50V-X7R-SMD" C-0805 65.925,34.7 r0 bottom value=100nF
C58 "CAP Cer 10uF-50V-X7R-SMD" C-0805 75.6,46.975 r270 bottom value=10uF
C59 "CAP Cer 100nF-50V-X7R-SMD" C-0805 55.8,14.575 r270 top value=100nF
C60 "CAP Cer 10uF-50V-X7R-SMD" C-0805 44.727,14.575 r90 top value=10uF
C61 "CAP Cer 100nF-50V-X7R-SMD" C-0805 47.302,14.575 r90 top value=100nF
CN1A "Connector XH-Straight-THD-2.54mm" XH-5 5,21 r90 top value=XH (schematic designator CN1)
CN1B "Connector XH-Straight-THD-2.54mm" XH-5 5,37 r90 top value=XH (schematic designator CN1)
CN1C "Connector XH-Straight-THD-2.54mm" XH-5 5,53 r90 top value=XH (schematic designator CN1)
CN1D "Connector XH-Straight-THD-2.54mm" XH-5 17.5,75 r0 top value=XH (schematic designator CN1)
CN1E "Connector XH-Straight-THD-2.54mm" XH-5 33.5,75 r0 top value=XH (schematic designator CN1)
CN1F "Connector XH-Straight-THD-2.54mm" XH-5 49.5,75 r0 top value=XH (schematic designator CN1)
CN1G "Connector XH-Straight-THD-2.54mm" XH-5 65.5,75 r0 top value=XH (schematic designator CN1)
CN1H "Connector XH-Straight-THD-2.54mm" XH-5 81.5,75 r0 top value=XH (schematic designator CN1)
CN2 "Connector XH-2-Straight-THD-2.54mm" XH-2 84.425,5 r180 top value=XH-2
CN3 "Connector FPC Straight/Right-?mm-50 Pin" CN-FPC-50-0.5mm-hor 25.75,3.737 r0 top
CN4 "Connector XH-Straight-THD-2.54mm" XH-6 95,61.15 r270 top value=XH
CN5 "Connector FPC Straight/Right-?mm-4 Pin" CN-FPC-4-1mm-hor 50,5.839 r0 top
D1A "Diode 1N4148-SMD" SOD80 11.4,19.825 r0 top (schematic designator D1)
D1B "Diode 1N4148-SMD" SOD80 11.4,35.8 r0 top (schematic designator D1)
D1C "Diode 1N4148-SMD" SOD80 11.4,51.8 r0 top (schematic designator D1)
D1D "Diode 1N4148-SMD" SOD80 16.3,68.6 r270 top (schematic designator D1)
D1E "Diode 1N4148-SMD" SOD80 32.3,68.6 r270 top (schematic designator D1)
D1F "Diode 1N4148-SMD" SOD80 48.325,68.6 r270 top (schematic designator D1)
D1G "Diode 1N4148-SMD" SOD80 64.325,68.6 r270 top (schematic designator D1)
D1H "Diode 1N4148-SMD" SOD80 80.3,68.6 r270 top (schematic designator D1)
D2 "Diode 1N4148-SMD" SOD80 62.2,23.625 r0 top
D3 "Diode 1N5408-SMD" D-DO214 84.5,35.425 r270 top
D4 "Diode Schottky SS34-SMD" D-DO214AB 84.4,14.1 r90 bottom
FB1 "Ferrite Bead SMD" FB-0805 35.095,59.7 r270 top
FB2 "Ferrite Bead SMD" FB-0805 68.65,14.575 r270 top
FB3 "Ferrite Bead SMD" FB-0805 44.725,10.5 r270 top
FB4 "FERRITE BEAD" FB-0805 52.45,50.125 r180 top
FB5 "Ferrite Bead SMD" FB-0805 68.675,23.15 r90 top
FB6 "Ferrite Bead SMD" FB-0805 55.802,19 r90 top
FB7 "Ferrite Bead SMD" FB-0805 73.1,46.975 r270 bottom
FB8 "Ferrite Bead SMD" FB-0805 70.6,46.975 r270 bottom
FB9 "Ferrite Bead SMD" FB-0805 47.3,10.5 r90 top
H1 "Header 4x1 Pin -Straight-Male-2.54mm" H-4pin-M-S 49.09,59.9 r0 top
H2 "Header 3x1 Pin /Military-Straight/Right-Male/Female-2.54mm" H-3pin-M-S 61.2,33.4 r90 top value=/Military
H3 "Header 3x1 Pin /Military-Straight/Right-Male/Female-2.54mm" H-3pin-M-S 20.15,35.85 r90 top value=/Military
L1 "IND 10uH-10x10mm-SMD" IND-SMD-1010 93,16.572 r90 bottom value=10uH
LED1 "LED GREEN-1206-SMD" LED-1206-Y 59.85,3.225 r270 top
LED2 "LED RED-1206-SMD" LED-1206-R 55.802,59.3 r270 top
LED3 "LED GREEN-1206-SMD" LED-1206-Y 53.3,23.525 r270 top
LED4 "LED GREEN-1206-SMD" LED-1206-Y 82.798,59.3 r90 top
MIC1 "Mic 2.2mm-THD" MIC-2.2mm 64.6,4.45 r90 top
NT1 "NET TIE-2" "NET TIE-2" 83.75,18.8 r0 bottom net-tie
Q1A "TR 2N2222-SMD" SOT23-213 12.2,26.8 r90 top value=2N2222 (schematic designator Q1)
Q1B "TR 2N2222-SMD" SOT23-213 12.2,42.8 r90 top value=2N2222 (schematic designator Q1)
Q1C "TR 2N2222-SMD" SOT23-213 12.2,58.8 r90 top value=2N2222 (schematic designator Q1)
Q1D "TR 2N2222-SMD" SOT23-213 23.3,67.8 r0 top value=2N2222 (schematic designator Q1)
Q1E "TR 2N2222-SMD" SOT23-213 39.3,67.8 r0 top value=2N2222 (schematic designator Q1)
Q1F "TR 2N2222-SMD" SOT23-213 55.3,67.8 r0 top value=2N2222 (schematic designator Q1)
Q1G "TR 2N2222-SMD" SOT23-213 71.3,67.8 r0 top value=2N2222 (schematic designator Q1)
Q1H "TR 2N2222-SMD" SOT23-213 87.3,67.8 r0 top value=2N2222 (schematic designator Q1)
Q2A "TR S8050-SMD" SOT23-213 12.2,23.1 r90 top value=S8050 (schematic designator Q2)
Q2B "TR S8050-SMD" SOT23-213 12.2,39.1 r90 top value=S8050 (schematic designator Q2)
Q2C "TR S8050-SMD" SOT23-213 12.2,55.1 r90 top value=S8050 (schematic designator Q2)
Q2D "TR S8050-SMD" SOT23-213 19.6,67.8 r0 top value=S8050 (schematic designator Q2)
Q2E "TR S8050-SMD" SOT23-213 35.6,67.8 r0 top value=S8050 (schematic designator Q2)
Q2F "TR S8050-SMD" SOT23-213 51.6,67.8 r0 top value=S8050 (schematic designator Q2)
Q2G "TR S8050-SMD" SOT23-213 67.6,67.8 r0 top value=S8050 (schematic designator Q2)
Q2H "TR S8050-SMD" SOT23-213 83.6,67.8 r0 top value=S8050 (schematic designator Q2)
R1A "RES 10K-5%-1/8W-SMD" R-0805 97,10.975 r180 top value=10K (schematic designator R1)
R1B "RES 10K-5%-1/8W-SMD" R-0805 97,17.975 r180 top value=10K (schematic designator R1)
R2A "RES 680R-5%-1/8W-SMD" R-0805 16.125,24.8 r0 top value=680R (schematic designator R2)
R2B "RES 680R-5%-1/8W-SMD" R-0805 16.125,40.8 r0 top value=680R (schematic designator R2)
R2C "RES 680R-5%-1/8W-SMD" R-0805 16.125,56.8 r0 top value=680R (schematic designator R2)
R2D "RES 680R-5%-1/8W-SMD" R-0805 21.3,63.875 r270 top value=680R (schematic designator R2)
R2E "RES 680R-5%-1/8W-SMD" R-0805 37.3,63.875 r270 top value=680R (schematic designator R2)
R2F "RES 680R-5%-1/8W-SMD" R-0805 53.3,63.875 r270 top value=680R (schematic designator R2)
R2G "RES 680R-5%-1/8W-SMD" R-0805 69.3,63.875 r270 top value=680R (schematic designator R2)
R2H "RES 680R-5%-1/8W-SMD" R-0805 85.3,63.875 r270 top value=680R (schematic designator R2)
R3A "RES 47K-5%-1/8W-SMD" R-0805 16.125,27.3 r0 top value=47K (schematic designator R3)
R3B "RES 47K-5%-1/8W-SMD" R-0805 16.125,43.3 r0 top value=47K (schematic designator R3)
R3C "RES 47K-5%-1/8W-SMD" R-0805 16.125,59.3 r0 top value=47K (schematic designator R3)
R3D "RES 47K-5%-1/8W-SMD" R-0805 23.8,63.875 r270 top value=47K (schematic designator R3)
R3E "RES 47K-5%-1/8W-SMD" R-0805 39.8,63.875 r270 top value=47K (schematic designator R3)
R3F "RES 47K-5%-1/8W-SMD" R-0805 55.8,63.875 r270 top value=47K (schematic designator R3)
R3G "RES 47K-5%-1/8W-SMD" R-0805 71.8,63.875 r270 top value=47K (schematic designator R3)
R3H "RES 47K-5%-1/8W-SMD" R-0805 87.8,63.875 r270 top value=47K (schematic designator R3)
R4A "RES 100R-5%-1/8W-SMD" R-0805 16.125,22.3 r180 top value=100R (schematic designator R4)
R4B "RES 100R-5%-1/8W-SMD" R-0805 16.125,38.3 r180 top value=100R (schematic designator R4)
R4C "RES 100R-5%-1/8W-SMD" R-0805 16.125,54.3 r180 top value=100R (schematic designator R4)
R4D "RES 100R-5%-1/8W-SMD" R-0805 18.8,63.875 r90 top value=100R (schematic designator R4)
R4E "RES 100R-5%-1/8W-SMD" R-0805 34.8,63.875 r90 top value=100R (schematic designator R4)
R4F "RES 100R-5%-1/8W-SMD" R-0805 50.8,63.875 r90 top value=100R (schematic designator R4)
R4G "RES 100R-5%-1/8W-SMD" R-0805 66.8,63.875 r90 top value=100R (schematic designator R4)
R4H "RES 100R-5%-1/8W-SMD" R-0805 82.8,63.875 r90 top value=100R (schematic designator R4)
R5A "RES 1K-5%-1/8W-SMD" R-0805 16.125,19.8 r180 top value=1K (schematic designator R5)
R5B "RES 1K-5%-1/8W-SMD" R-0805 16.125,35.8 r180 top value=1K (schematic designator R5)
R5C "RES 1K-5%-1/8W-SMD" R-0805 16.125,51.8 r180 top value=1K (schematic designator R5)
R5D "RES 1K-5%-1/8W-SMD" R-0805 16.3,63.875 r90 top value=1K (schematic designator R5)
R5E "RES 1K-5%-1/8W-SMD" R-0805 32.3,63.875 r90 top value=1K (schematic designator R5)
R5F "RES 1K-5%-1/8W-SMD" R-0805 48.3,63.875 r90 top value=1K (schematic designator R5)
R5G "RES 1K-5%-1/8W-SMD" R-0805 64.3,63.875 r90 top value=1K (schematic designator R5)
R5H "RES 1K-5%-1/8W-SMD" R-0805 80.3,63.875 r90 top value=1K (schematic designator R5)
R6A "RES 47K-5%-1/8W-SMD" R-0805 10.625,17.198 r0 top value=47K (schematic designator R6)
R6B "RES 47K-5%-1/8W-SMD" R-0805 10.625,33.198 r0 top value=47K (schematic designator R6)
R6C "RES 47K-5%-1/8W-SMD" R-0805 10.625,49.198 r0 top value=47K (schematic designator R6)
R6D "RES 47K-5%-1/8W-SMD" R-0805 13.698,69.375 r270 top value=47K (schematic designator R6)
R6E "RES 47K-5%-1/8W-SMD" R-0805 29.699,69.375 r270 top value=47K (schematic designator R6)
R6F "RES 47K-5%-1/8W-SMD" R-0805 45.698,69.375 r270 top value=47K (schematic designator R6)
R6G "RES 47K-5%-1/8W-SMD" R-0805 61.698,69.375 r270 top value=47K (schematic designator R6)
R6H "RES 47K-5%-1/8W-SMD" R-0805 77.698,69.375 r270 top value=47K (schematic designator R6)
R7A "RES 470R-5%-1/8W-SMD" R-0805 10.575,14.6 r0 top value=470R (schematic designator R7)
R7B "RES 470R-5%-1/8W-SMD" R-0805 10.575,30.6 r0 top value=470R (schematic designator R7)
R7C "RES 470R-5%-1/8W-SMD" R-0805 10.575,46.6 r0 top value=470R (schematic designator R7)
R7D "RES 470R-5%-1/8W-SMD" R-0805 11.1,69.425 r270 top value=470R (schematic designator R7)
R7E "RES 470R-5%-1/8W-SMD" R-0805 27.1,69.425 r270 top value=470R (schematic designator R7)
R7F "RES 470R-5%-1/8W-SMD" R-0805 43.1,69.425 r270 top value=470R (schematic designator R7)
R7G "RES 470R-5%-1/8W-SMD" R-0805 59.1,69.425 r270 top value=470R (schematic designator R7)
R7H "RES 470R-5%-1/8W-SMD" R-0805 75.1,69.425 r270 top value=470R (schematic designator R7)
R8 "RES 4.7K-5%-1/8W-SMD" R-0805 32.6,59.7 r270 top value=4.7K
R9 "RES 4.7K-5%-1/8W-SMD" R-0805 30.097,59.7 r270 top value=4.7K
R10 "RES 1K-5%-1/8W-SMD" R-0805 59.85,7.525 r90 top value=1K
R11 "RES 4.7K-5%-1/8W-SMD" R-0805 76.15,8.575 r180 top value=4.7K
R12 "RES 4.7K-5%-1/8W-SMD" R-0805 72.2,8.575 r180 top value=4.7K
R13 "RES 82K-5%-1/8W-SMD" R-0805 82,25.9 r90 top value=82K
R14 "RES 4.7K-5%-1/8W-SMD" R-0805 72.2,1.3 r0 top value=4.7K
R15 "RES 10K-5%-1/8W-SMD" R-0805 16.925,10.5 r90 top value=10K
R16 "RES 10R-5%-1/8W-SMD" R-0805 19.35,10.5 r270 top value=10R
R17 "RES 10R-5%-1/8W-SMD" R-0805 21.775,10.5 r270 top value=10R
R18 "RES 10R-5%-1/8W-SMD" R-0805 24.2,10.5 r270 top value=10R
R43 "RES 10R-5%-1/8W-SMD" R-0805 30.125,10.5 r270 top value=10R
R44 "RES 10K-5%-1/8W-SMD" R-0805 37.4,10.5 r270 top value=10K
R45 "RES 10R-5%-1/8W-SMD" R-0805 32.55,10.5 r270 top value=10R
R46 "RES 10K-5%-1/8W-SMD" R-0805 23.275,19.525 r180 top value=10K
R47 "RES 10K-5%-1/8W-SMD" R-0805 20.15,41.875 r270 top value=10K
R48 "RES 10K-5%-1/8W-SMD" R-0805 61.2,27.325 r90 top value=10K
R49 "RES 2.2K-5%-1/8W-SMD" R-0805 59.2,59.7 r90 top value=2.2K
R50 "RES 1K-5%-1/8W-SMD" R-0805 66.175,23.15 r90 top value=1K
R51 "RES 2.2K-5%-1/8W-SMD" R-0805 55.8,23.15 r270 top value=2.2K
R52 "RES 2.2K-5%-1/8W-SMD" R-0805 80.3,59.675 r90 top value=2.2K
R53 "RES 100K-5%-1/8W-SMD" R-0805 76.1,18.875 r90 bottom value=100K
R54 "RES 1.2R-5%-1/8W-SMD" R-1206 74,10.525 r270 bottom value=1.2R
R55 "RES 1.2R-5%-1/8W-SMD" R-1206 77,10.525 r270 bottom value=1.2R
R56 "RES 4.7K-5%-1/8W-SMD" R-0805 66.175,14.575 r90 top value=4.7K
R57 "RES 10K-5%-1/8W-SMD" R-0805 66.175,19 r90 top value=10K
R58 "RES 10K-5%-1/8W-SMD" R-0805 68.652,19 r90 top value=10K
R59 "RES 22R-5%-1/8W-SMD" R-0805 65.925,30.7 r0 bottom value=22R
R60 "RES 10K-5%-1/8W-SMD" R-0805 58.277,14.575 r270 top value=10K
R61 "RES 10K-5%-1/8W-SMD" R-0805 47.298,19 r270 top value=10K
S1A "Push Button 3x6mm-2Pin-SMD" SW-SMD-2pin-3x6 94.4,14.475 r0 top (schematic designator S1)
S1B "Push Button 3x6mm-2Pin-SMD" SW-SMD-2pin-3x6 94.4,21.475 r0 top (schematic designator S1)
S2 "Push Button 3x6mm-2Pin-SMD" SW-SMD-2pin-3x6 24.075,15.525 r0 top
SC1 "Screw 3mm" Screw_M3 4.8,4.7 r180 top locked
SC2 "Screw 3mm" Screw_M3 4.8,74.7 r180 top locked
SC3 "Screw 3mm" Screw_M3 95,5 r0 top locked
SC4 "Screw 3mm" Screw_M3 95,75 r0 top locked
TP1 "" "TEST POINT-SMD" 14,1.3 r180 bottom net-tie
TP2 "" "TEST POINT-SMD" 29.85,1.475 r180 bottom net-tie
TP3 "" "TEST POINT-SMD" 32.175,1.475 r180 bottom net-tie
TP4 "" "TEST POINT-SMD" 34.5,1.475 r180 bottom net-tie
TP5 "" "TEST POINT-SMD" 36.825,1.475 r180 bottom net-tie
TP6 "" "TEST POINT-SMD" 39.15,1.475 r180 bottom net-tie
TR1 "Terminal KF301-2Pin-5.08mm-Straight" KF301-2pin 92.9,29.46 r90 top
U1 "IC AT24C04-SMD" SOIC8 22.2,58.795 r0 top
U2 "IC ISD1730-SMD" SOIC28-wide 78.937,16.75 r90 top
U3 "STM32F429ZGT6" STM-LQFP144_N 40.6,39.1 r90 bottom locked
U4 "Reg LF33-3.3V-SMD" TO252-3pin 69.8,55.3 r180 top
U5 "Reg 7805-5V-THD" TO220-HEARSINK-1 83.875,48.5 r90 top
U6 "IC MP3202-SMD" SOT23-6N 80.45,13.255 r90 bottom
U7 "IC W25Qxx-SMD" SOIC8-W 62.227,16.725 r90 top
U8 "IC IS42S16400J-7TLI-SMD" TSSOP-54 75.825,33.1 r180 bottom
U9 "IC XPT2046-SMD" TSSOP-16 51.85,16.738 r90 top
Y1 "Crystal 8MHz-SMD" CRYSTAL-SMD 36.15,15.525 r180 top value=8MHz
ZD1A "Zener -3.3V-SMD" SOD80 15.4,17.2 r0 top (schematic designator ZD1)
ZD1B "Zener -3.3V-SMD" SOD80 15.4,33.175 r0 top (schematic designator ZD1)
ZD1C "Zener -3.3V-SMD" SOD80 15.4,49.2 r0 top (schematic designator ZD1)
ZD1D "Zener -3.3V-SMD" SOD80 13.7,64.6 r270 top (schematic designator ZD1)
ZD1E "Zener -3.3V-SMD" SOD80 29.7,64.6 r270 top (schematic designator ZD1)
ZD1F "Zener -3.3V-SMD" SOD80 45.7,64.6 r270 top (schematic designator ZD1)
ZD1G "Zener -3.3V-SMD" SOD80 61.7,64.6 r270 top (schematic designator ZD1)
ZD1H "Zener -3.3V-SMD" SOD80 77.7,64.6 r270 top (schematic designator ZD1)

## Footprints (in the part's own frame and the unit in brackets; to place one, negate y for a bottom-side part, rotate by r counter-clockwise, add the part's x,y. Pads: shape width x height; smd on the part's side, far side on the other; paste and mask are expansions set on the pad)
BAT-HOLDER-SMD-1220 [mm]
  oval 2.5x5 smd: 1(0,8.238)
  rrect50% 2.5x5 smd: 2(0,-8.237)
  silkscreen extent -7.32,-7.41 7.32,7.71, body extent -7.45,-9.74 7.45,9.51, height 4.2
C-0805 [mm]
  rrect50% 1.05x1.6 smd: 1(-0.975,0) 2(0.975,0)
  silkscreen extent -1.71,-1.01 1.71,1.01, body extent -1.03,-0.63 0.97,0.63, height 0.61
CAP-CER-7x2.5-Ls5 [mm] "P2P : 5mm"
  round 2 hole 1: 1(-2.5,0) 2(2.5,0)
  silkscreen extent -3.72,-1.22 3.72,1.22, body extent -2.85,-1 2.84,1, height 5.5
cap-Elec-5x7 [mm] "P2P : 2.54mm"
  oval 1.7x2 hole 1: 1(-1.27,0)
  rrect25% 1.7x2 hole 1: 2(1.27,0)
  silkscreen extent -2.62,-2.61 2.62,2.62, body extent -2.53,-2.5 2.48,2.5, height 2.5
CAP-Elec-10x25-5 [mm] "P2P : 5mm"
  oval 2.6x3.3 hole 1.3: 1(-2.5,0)
  rrect25% 2.6x3.3 hole 1.3: 2(2.5,0)
  silkscreen extent -5.19,-5.2 5.2,5.2, body extent -5,-5 5,5, height 25.2
CN-FPC-4-1mm-hor [mm]
  rrect50% 0.5x1.8 smd: 1(-1.5,1.189) 2(-0.5,1.189) 3(0.5,1.189) 4(1.5,1.189)
  rrect50% 2x2.2 smd: 5(-4.9,-1.189) 6(4.9,-1.189)
  silkscreen extent -5.5,-5.72 5.35,2.39, body extent -5.15,-5.81 5.15,1.79, height 2.75
CN-FPC-50-0.5mm-hor [mm]
  rrect50% 0.3x1.5 smd: 1(-12.25,1.463) 2(-11.75,1.463) 3(-11.25,1.463) 4(-10.75,1.463) 5(-10.25,1.463) 6(-9.75,1.463) 7(-9.25,1.463) 8(-8.75,1.463) 9(-8.25,1.463) 10(-7.75,1.463) 11(-7.25,1.463) 12(-6.75,1.463) 13(-6.25,1.463) 14(-5.75,1.463) 15(-5.25,1.463) 16(-4.75,1.463) 17(-4.25,1.463) 18(-3.75,1.463) 19(-3.25,1.463) 20(-2.75,1.463) 21(-2.25,1.463) 22(-1.75,1.463) 23(-1.25,1.463) 24(-0.75,1.463) 25(-0.25,1.463) 26(0.25,1.463) 27(0.75,1.463) 28(1.25,1.463) 29(1.75,1.463) 30(2.25,1.463) 31(2.75,1.463) 32(3.25,1.463) 33(3.75,1.463) 34(4.25,1.463) 35(4.75,1.463) 36(5.25,1.463) 37(5.75,1.463) 38(6.25,1.463) 39(6.75,1.463) 40(7.25,1.463) 41(7.75,1.463) 42(8.25,1.463) 43(8.75,1.463) 44(9.25,1.463) 45(9.75,1.463) 46(10.25,1.463) 47(10.75,1.463) 48(11.25,1.463) 49(11.75,1.463) 50(12.25,1.463)
  rrect50% 1.5x1.5 smd: 51(-14.825,-1.462) 52(14.825,-1.462)
  silkscreen extent -15.5,-3.62 15.63,2.37, body extent -15.25,-3.69 15.25,1.94, height 2.11
CRYSTAL-SMD [mm]
  oval 4.5x1.5 smd: 1(-4.25,0) 2(4.25,0)
  silkscreen extent -5.75,-2.5 5.75,2.5, body extent -6.21,-2.25 6.09,2.25, height 5.18
D-DO214 [mm]
  rrect50% 2x3.2 smd: 1(3.425,0) 2(-3.475,0)
  silkscreen extent -4.72,-3.3 4.68,3.3, body extent -4.06,-3.15 4.06,3.15
D-DO214AB [mm]
  rrect50% 2x2 smd: 1(-2.1,0) 2(2.1,0)
  silkscreen extent -3.4,-1.7 3.4,1.7, body extent -2.65,-1.81 2.65,1.81, height 2.2
FB-0805 [mm]
  rrect50% 1.05x1.6 smd: 1(-0.975,0) 2(0.975,0)
  silkscreen extent -1.5,-1 1.5,1, body extent -1,-0.63 1,0.63, height 0.84
H-3pin-M-S [mm]
  rrect50% 1.8x1.8 hole 0.9: 1(-2.54,0)
  round 1.8 hole 0.9: 2(0,0) 3(2.54,0)
  silkscreen extent -3.81,-1.27 3.81,1.27, body extent -3.79,-1.25 3.79,1.25, height 8.6
H-4pin-M-S [mm]
  rrect50% 1.8x1.8 hole 0.9: 1(-3.81,0)
  round 1.8 hole 0.9: 2(-1.27,0) 3(1.27,0) 4(3.81,0)
  silkscreen extent -5.08,-1.27 5.08,1.27, body extent -5.06,-1.25 5.06,1.25, height 8.6
IND-SMD-1010 [mm]
  rrect50% 3x3 smd: 1(4.521,0) 2(-4.572,0)
  silkscreen extent -6.25,-6.25 6.22,6.27, body extent -6.25,-6.25 6.25,6.25, height 8.8
KF301-2pin [mm] "P2P : 5.08mm"
  round 3 hole 1.5: 1(-2.54,0) 2(2.54,0)
  silkscreen extent -5,-4.5 5,4.5, body extent -5.68,-3.05 4.92,4.55, height 10
LED-1206-R [mm]
  rrect50% 1x1.6 smd: 1(1.4,0) 2(-1.4,0)
  silkscreen extent -2.11,-1 2.08,1, body extent -1.6,-0.8 1.6,0.8, height 1.1
LED-1206-Y [mm]
  rrect50% 1x1.6 smd: 1(1.4,0) 2(-1.4,0)
  silkscreen extent -2.11,-1 2.08,1, body extent -1.6,-0.8 1.6,0.8, height 1.11
MIC-2.2mm [mm]
  round 1.6 hole 0.6: 1(0.95,0) 2(-0.95,0)
  silkscreen extent -3.49,-4.5 3.51,2.5, body extent -2.99,-3.99 3,2, height 2.35
"NET TIE-2" [mm]
  rrect50% 0.8x1.1 smd: 1(-0.75,0) 2(0.75,0)
  Top Layer region: -0.8,0.55 0.8,0.55 0.8,-0.55 -0.8,-0.55
R-0805 [mm]
  rrect50% 1.05x1.6 smd: 1(-0.975,0) 2(0.975,0)
  silkscreen extent -1.71,-1.01 1.71,1.01, body extent -1,-0.63 1,0.63, height 0.44
R-1206 [mm]
  rrect50% 1.45x2.1 smd: 1(-1.475,0) 2(1.475,0)
  silkscreen extent -2.41,-1.27 2.41,1.27, body extent -1.6,-0.8 1.6,0.8, height 0.59
Screw_M3 [mm] "H : 3.5mm"
  round 7 hole 3.5: 1(0,0)
  silkscreen extent -3.73,-3.73 3.73,3.73, body extent -2.79,-2.8 2.79,2.8, height 2.4
SOD80 [mm]
  rrect50% 1.3x1.7 smd: 1(1.7,0) 2(-1.7,0)
  silkscreen extent -2.55,-1.1 2.55,1.1, body extent -1.88,-0.79 1.82,0.79, height 1.6
SOIC8 [mm]
  rrect25% 1.6x0.65 smd: 1(-2.7,1.905) 2(-2.7,0.635) 3(-2.7,-0.635) 4(-2.7,-1.905) 5(2.7,-1.905) 6(2.7,-0.635) 7(2.7,0.635) 8(2.7,1.905)
  silkscreen extent -3.38,-2.54 3.38,2.54, body extent -3.01,-2.45 2.99,2.45, height 1.75
SOIC8-W [mm]
  rrect25% 2.2x0.65 smd: 1(-3.727,1.905) 2(-3.727,0.635) 3(-3.727,-0.635) 4(-3.727,-1.905) 5(3.727,-1.905) 6(3.727,-0.635) 7(3.727,0.635) 8(3.727,1.905)
  silkscreen extent -4.48,-2.54 4.55,2.54, body extent -4.06,-2.5 4.06,2.5, height 2
SOIC28-wide [mm]
  rrect50% 2x0.625 smd: 1(-5.15,8.287) 2(-5.15,7.012) 4(-5.15,4.462) 5(-5.15,3.187) 6(-5.15,1.913) 7(-5.15,0.638) 8(-5.15,-0.637) 10(-5.15,-3.187) 11(-5.15,-4.462) 12(-5.15,-5.737) 13(-5.15,-7.012) 14(-5.15,-8.287) 15(5.15,-8.287) 16(5.15,-7.012) 17(5.15,-5.737) 18(5.15,-4.462) 19(5.15,-3.187) 20(5.15,-1.912) 21(5.15,-0.637) 22(5.15,0.638) 23(5.15,1.913) 24(5.15,3.187) 25(5.15,4.462) 26(5.15,5.737) 27(5.15,7.012) 28(5.15,8.287)
  rrect50% 2x0.625 on Top Overlay: 3(-5.15,5.737) 9(-5.15,-1.912)
  silkscreen extent -5.9,-8.92 5.99,8.69, body extent -5.16,-9.01 5.14,8.89, height 2.65
SOT23-6N [mm]
  rrect25% 1.21x0.58 smd: 1(-1.255,0.95) 2(-1.255,0) 3(-1.255,-0.95) 4(1.255,-0.95) 5(1.255,0) 6(1.255,0.95)
  silkscreen extent -0.8,-1.56 0.8,1.56, body extent -1.4,-1.45 1.4,1.45, height 1.45
SOT23-213 [mm]
  rrect50% 1x1 smd mask+0.07: 1(1,-1) 2(-1,-1) 3(0,1)
  silkscreen extent -1.61,-1 1.61,0.79, body extent -1.5,-1.25 1.5,1.25, height 1.09
STM-LQFP144_N [mm] "Thin QFP, 144-Leads, Body 20x20mm, Pitch 0.5mm, IPC Medium Density"
  oval 2.8x0.3 smd: 1(-11.05,8.75) 2(-11.05,8.25) 3(-11.05,7.75) 4(-11.05,7.25) 5(-11.05,6.75) 6(-11.05,6.25) 7(-11.05,5.75) 8(-11.05,5.25) 9(-11.05,4.75) 10(-11.05,4.25) 11(-11.05,3.75) 12(-11.05,3.25) 13(-11.05,2.75) 14(-11.05,2.25) 15(-11.05,1.75) 16(-11.05,1.25) 17(-11.05,0.75) 18(-11.05,0.25) 19(-11.05,-0.25) 20(-11.05,-0.75) 21(-11.05,-1.25) 22(-11.05,-1.75) 23(-11.05,-2.25) 24(-11.05,-2.75) 25(-11.05,-3.25) 26(-11.05,-3.75) 27(-11.05,-4.25) 28(-11.05,-4.75) 29(-11.05,-5.25) 30(-11.05,-5.75) 31(-11.05,-6.25) 32(-11.05,-6.75) 33(-11.05,-7.25) 34(-11.05,-7.75) 35(-11.05,-8.25) 36(-11.05,-8.75) 73(11.05,-8.75) 74(11.05,-8.25) 75(11.05,-7.75) 76(11.05,-7.25) 77(11.05,-6.75) 78(11.05,-6.25) 79(11.05,-5.75) 80(11.05,-5.25) 81(11.05,-4.75) 82(11.05,-4.25) 83(11.05,-3.75) 84(11.05,-3.25) 85(11.05,-2.75) 86(11.05,-2.25) 87(11.05,-1.75) 88(11.05,-1.25) 89(11.05,-0.75) 90(11.05,-0.25) 91(11.05,0.25) 92(11.05,0.75) 93(11.05,1.25) 94(11.05,1.75) 95(11.05,2.25) 96(11.05,2.75) 97(11.05,3.25) 98(11.05,3.75) 99(11.05,4.25) 100(11.05,4.75) 101(11.05,5.25) 102(11.05,5.75) 103(11.05,6.25) 104(11.05,6.75) 105(11.05,7.25) 106(11.05,7.75) 107(11.05,8.25) 108(11.05,8.75)
  oval 0.3x2.8 smd: 37(-8.75,-11.05) 38(-8.25,-11.05) 39(-7.75,-11.05) 40(-7.25,-11.05) 41(-6.75,-11.05) 42(-6.25,-11.05) 43(-5.75,-11.05) 44(-5.25,-11.05) 45(-4.75,-11.05) 46(-4.25,-11.05) 47(-3.75,-11.05) 48(-3.25,-11.05) 49(-2.75,-11.05) 50(-2.25,-11.05) 51(-1.75,-11.05) 52(-1.25,-11.05) 53(-0.75,-11.05) 54(-0.25,-11.05) 55(0.25,-11.05) 56(0.75,-11.05) 57(1.25,-11.05) 58(1.75,-11.05) 59(2.25,-11.05) 60(2.75,-11.05) 61(3.25,-11.05) 62(3.75,-11.05) 63(4.25,-11.05) 64(4.75,-11.05) 65(5.25,-11.05) 66(5.75,-11.05) 67(6.25,-11.05) 68(6.75,-11.05) 69(7.25,-11.05) 70(7.75,-11.05) 71(8.25,-11.05) 72(8.75,-11.05) 109(8.75,11.05) 110(8.25,11.05) 111(7.75,11.05) 112(7.25,11.05) 113(6.75,11.05) 114(6.25,11.05) 115(5.75,11.05) 116(5.25,11.05) 117(4.75,11.05) 118(4.25,11.05) 119(3.75,11.05) 120(3.25,11.05) 121(2.75,11.05) 122(2.25,11.05) 123(1.75,11.05) 124(1.25,11.05) 125(0.75,11.05) 126(0.25,11.05) 127(-0.25,11.05) 128(-0.75,11.05) 129(-1.25,11.05) 130(-1.75,11.05) 131(-2.25,11.05) 132(-2.75,11.05) 133(-3.25,11.05) 134(-3.75,11.05) 135(-4.25,11.05) 136(-4.75,11.05) 137(-5.25,11.05) 138(-5.75,11.05) 139(-6.25,11.05) 140(-6.75,11.05) 141(-7.25,11.05) 142(-7.75,11.05) 143(-8.25,11.05) 144(-8.75,11.05)
  silkscreen extent -10.67,-9.25 9.25,9.58, body extent -10,-10 10,10, height 1.6
SW-SMD-2pin-3x6 [mm]
  rrect50% 2x2 smd: 1(-3.6,0) 2(3.6,0)
  silkscreen extent -2.11,-1.27 2.11,1.33, body extent -4,-1.8 4,1.8, height 2.5
TAN-A [mm]
  rrect50% 1.5x1.8 smd: 1(-1.4,0) 2(1.4,0)
  silkscreen extent -2.35,-1.1 2.35,1.1, body extent -1.7,-0.84 1.7,0.84, height 1.71
"TEST POINT-SMD" [mm]
  round 1.5 smd: 1(0,0)
  silkscreen extent -0.95,-0.95 0.95,0.95
TO220-HEARSINK-1 [mm]
  oval 2x2.5 hole 1.2: 1(-2.54,-2.95) 2(0,-2.95) 3(2.54,-2.95)
  round 1.8 hole 1.2: 4(-0.05,2.95)
  silkscreen extent -7.35,-4.35 7.27,5.23, body extent -7.5,-4.45 7.4,5.35, height 21.1
TO252-3pin [mm]
  rrect50% 1x2.1 smd: 1(-2.285,-3.375) 3(2.285,-3.375)
  rrect50% 5.4x6.2 smd: 2(0,3.375)
  silkscreen extent -3.08,-4.32 3.09,6.38, body extent -3.27,-4.11 3.27,5.83, height 2.39
TSSOP-16 [mm]
  rrect25% 1.4x0.35 smd: 1(-3.237,2.275) 2(-3.237,1.625) 3(-3.237,0.975) 4(-3.237,0.325) 5(-3.237,-0.325) 6(-3.237,-0.975) 7(-3.237,-1.625) 8(-3.237,-2.275) 9(3.238,-2.275) 10(3.238,-1.625) 11(3.238,-0.975) 12(3.238,-0.325) 13(3.238,0.325) 14(3.238,0.975) 15(3.238,1.625) 16(3.238,2.275)
  silkscreen extent -3.99,-2.45 3.99,3.02, body extent -3.2,-2.5 3.2,2.5, height 1.1
TSSOP-54 [mm]
  rrect25% 1.5x0.5 smd: 1(-5.825,10.4)
  rrect50% 1.5x0.5 smd: 2(-5.825,9.6) 3(-5.825,8.8) 4(-5.825,8) 5(-5.825,7.2) 6(-5.825,6.4) 7(-5.825,5.6) 8(-5.825,4.8) 9(-5.825,4) 10(-5.825,3.2) 11(-5.825,2.4) 12(-5.825,1.6) 13(-5.825,0.8) 14(-5.825,0) 15(-5.825,-0.8) 16(-5.825,-1.6) 17(-5.825,-2.4) 18(-5.825,-3.2) 19(-5.825,-4) 20(-5.825,-4.8) 21(-5.825,-5.6) 22(-5.825,-6.4) 23(-5.825,-7.2) 24(-5.825,-8) 25(-5.825,-8.8) 26(-5.825,-9.6) 27(-5.825,-10.4) 28(5.825,-10.4) 29(5.825,-9.6) 30(5.825,-8.8) 31(5.825,-8) 32(5.825,-7.2) 33(5.825,-6.4) 34(5.825,-5.6) 35(5.825,-4.8) 36(5.825,-4) 37(5.825,-3.2) 38(5.825,-2.4) 39(5.825,-1.6) 40(5.825,-0.8) 41(5.825,0) 42(5.825,0.8) 43(5.825,1.6) 44(5.825,2.4) 45(5.825,3.2) 46(5.825,4) 47(5.825,4.8) 48(5.825,5.6) 49(5.825,6.4) 50(5.825,7.2) 51(5.825,8) 52(5.825,8.8) 53(5.825,9.6) 54(5.825,10.4)
  silkscreen extent -6.58,-11 6.58,11.2, body extent -5.89,-11.12 5.87,11.1, height 1.25
XH-2 [mm]
  rrect50% 1.8x2.5 hole 0.9: 1(-1.25,0)
  oval 1.8x2.5 hole 0.9: 2(1.25,0)
  silkscreen extent -3.68,-3.4 3.68,2.41, body extent -3.69,-3.4 3.71,2.35, height 7
XH-5 [mm]
  rrect50% 1.8x2.5 hole 1: 1(-5,0)
  oval 1.8x2.5 hole 1: 2(-2.5,0) 3(0,0) 4(2.5,0) 5(5,0)
  silkscreen extent -7.45,-3.4 7.45,2.35, body extent -7.45,-3.39 7.45,2.36, height 7.1
XH-6 [mm]
  rrect50% 1.8x2.5 hole 1: 1(-6.25,0)
  oval 1.8x2.5 hole 1: 2(-3.75,0) 3(-1.25,0) 4(1.25,0) 5(3.75,0) 6(6.25,0)
  silkscreen extent -8.7,-3.4 8.7,2.35, body extent -8.7,-3.38 8.7,2.37, height 7.1